# Altium PCB Power_Box_V0.PcbDoc (part 1 of 4)
Units mm, origin at the board's own origin, x right, y up, seen from the top; angles counter-clockwise.
Board outline 145 x 110 mm, 2 copper layers (Top Layer, Bottom Layer); 400 components, 300 nets, 1205 pads, 270 vias.
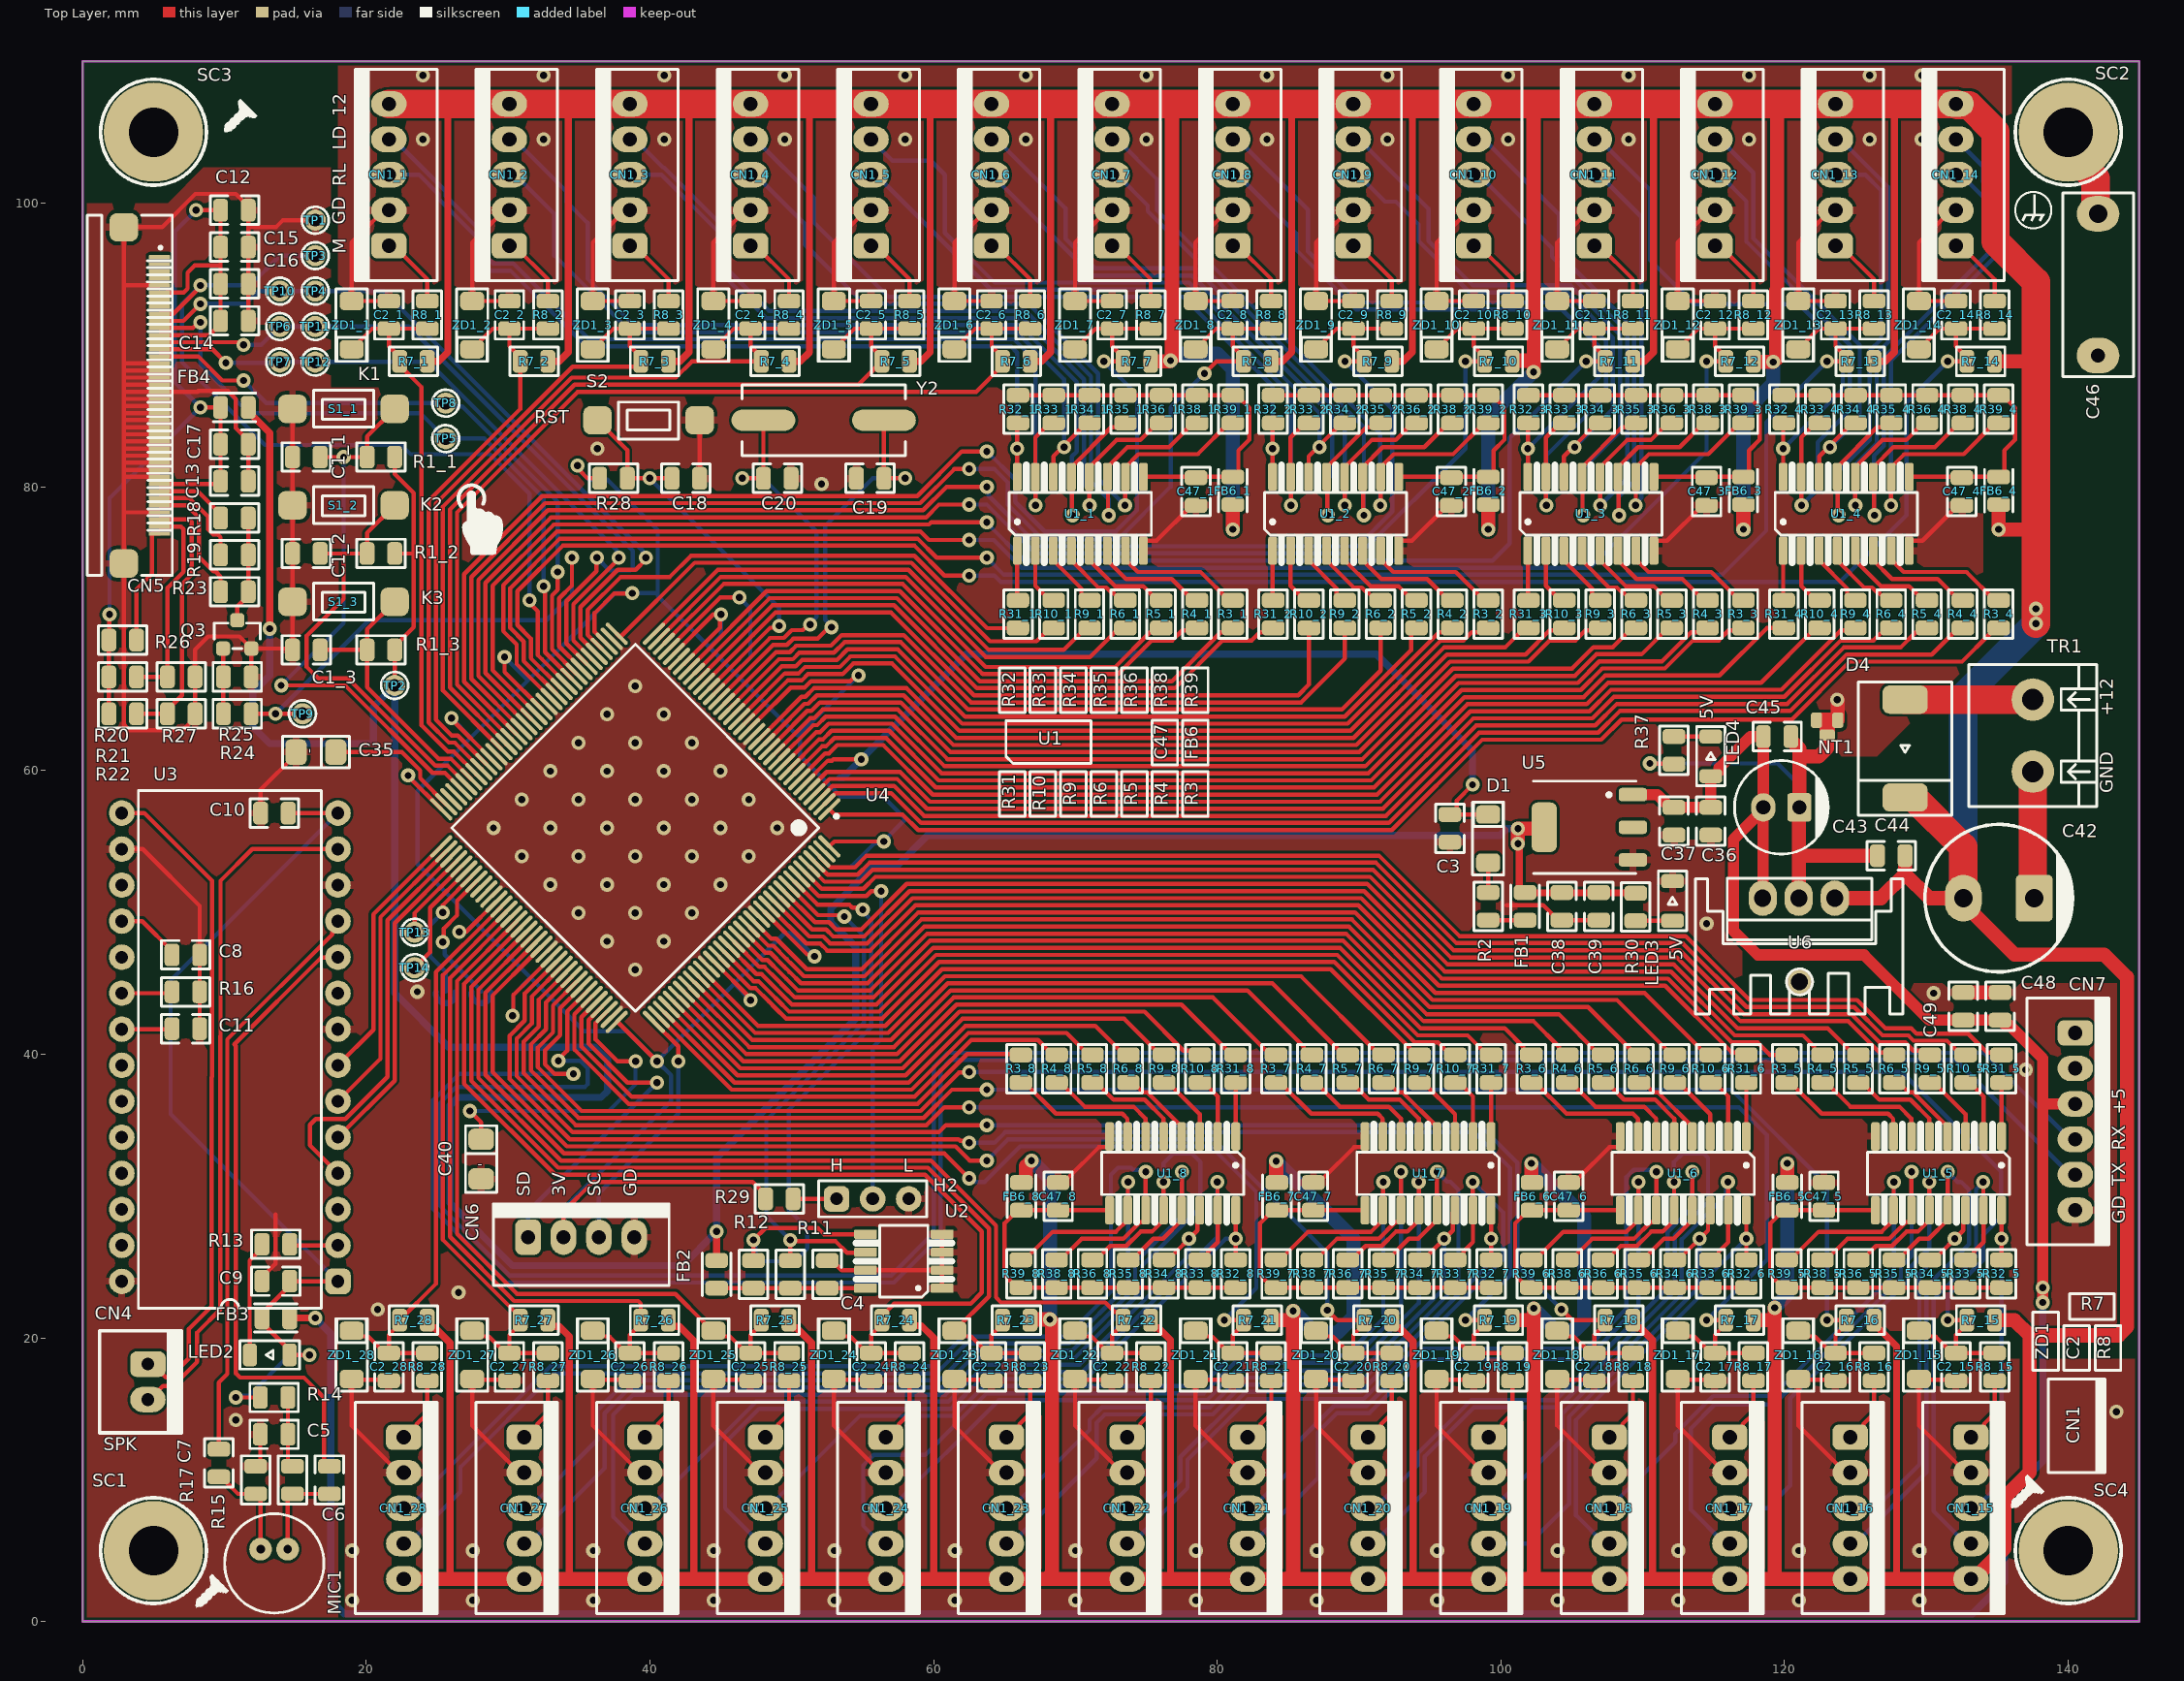
[diagram p0: Top Layer view]
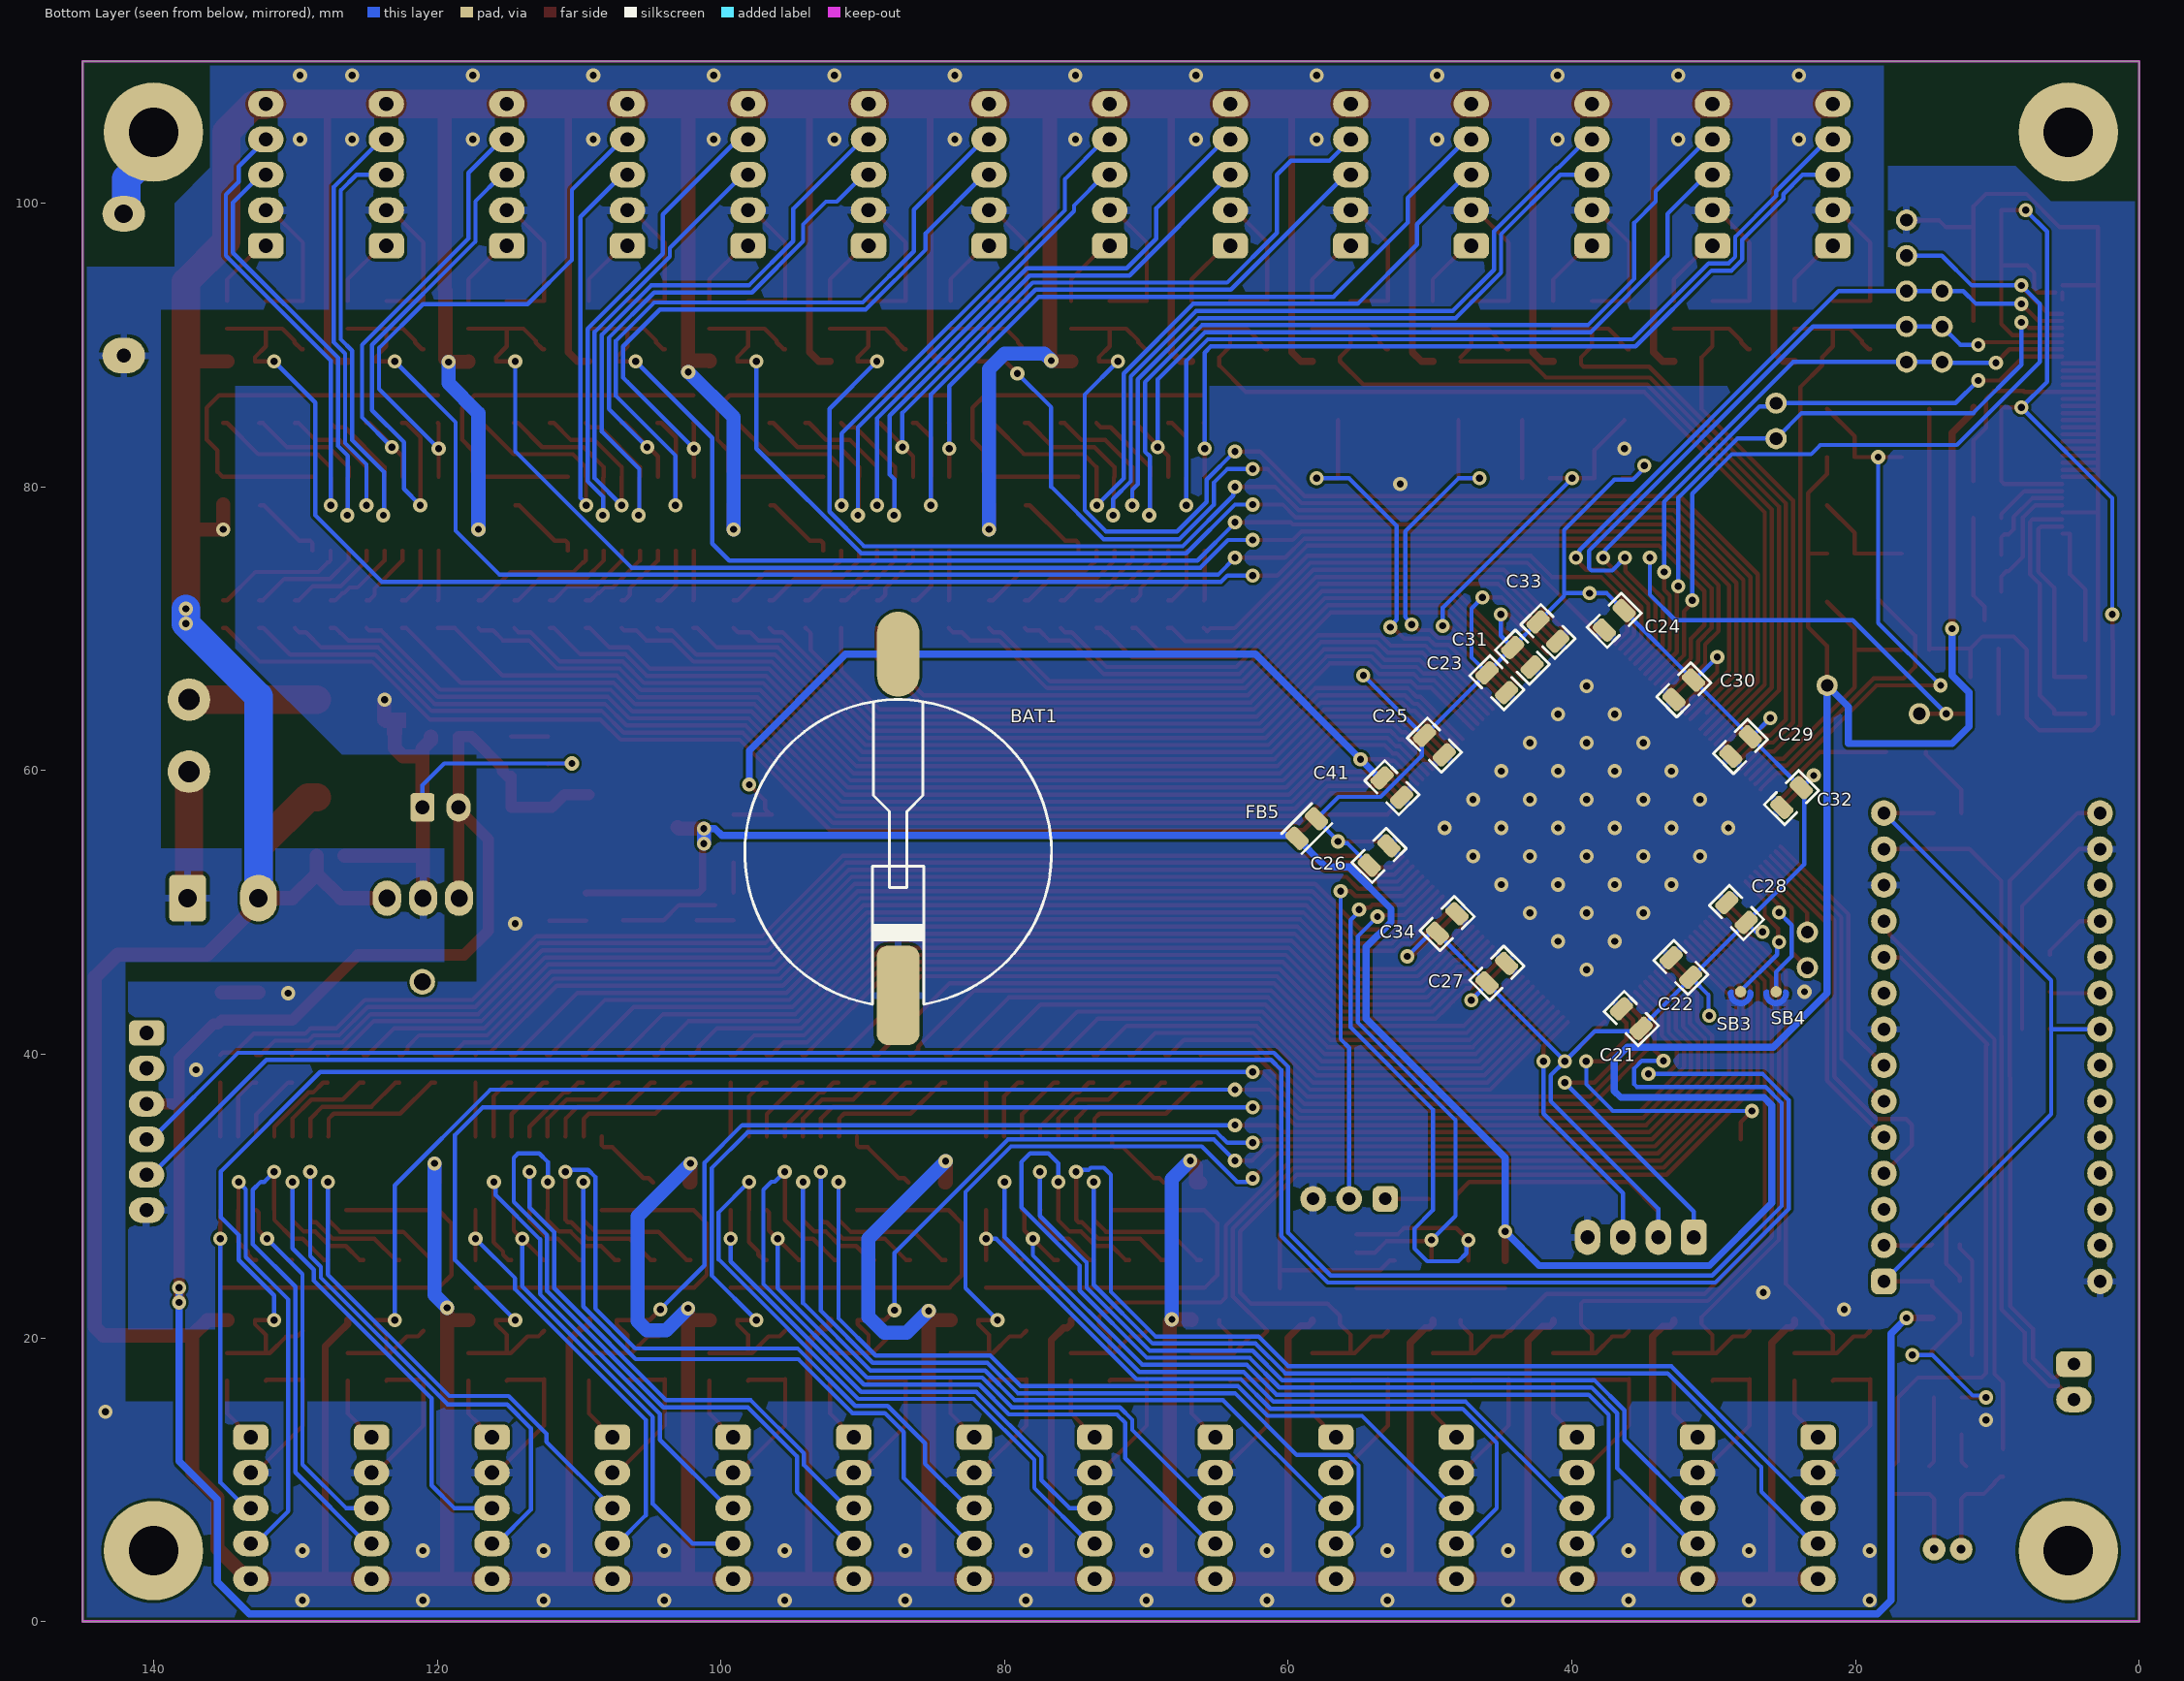
[diagram p1: Bottom Layer view, seen from below]
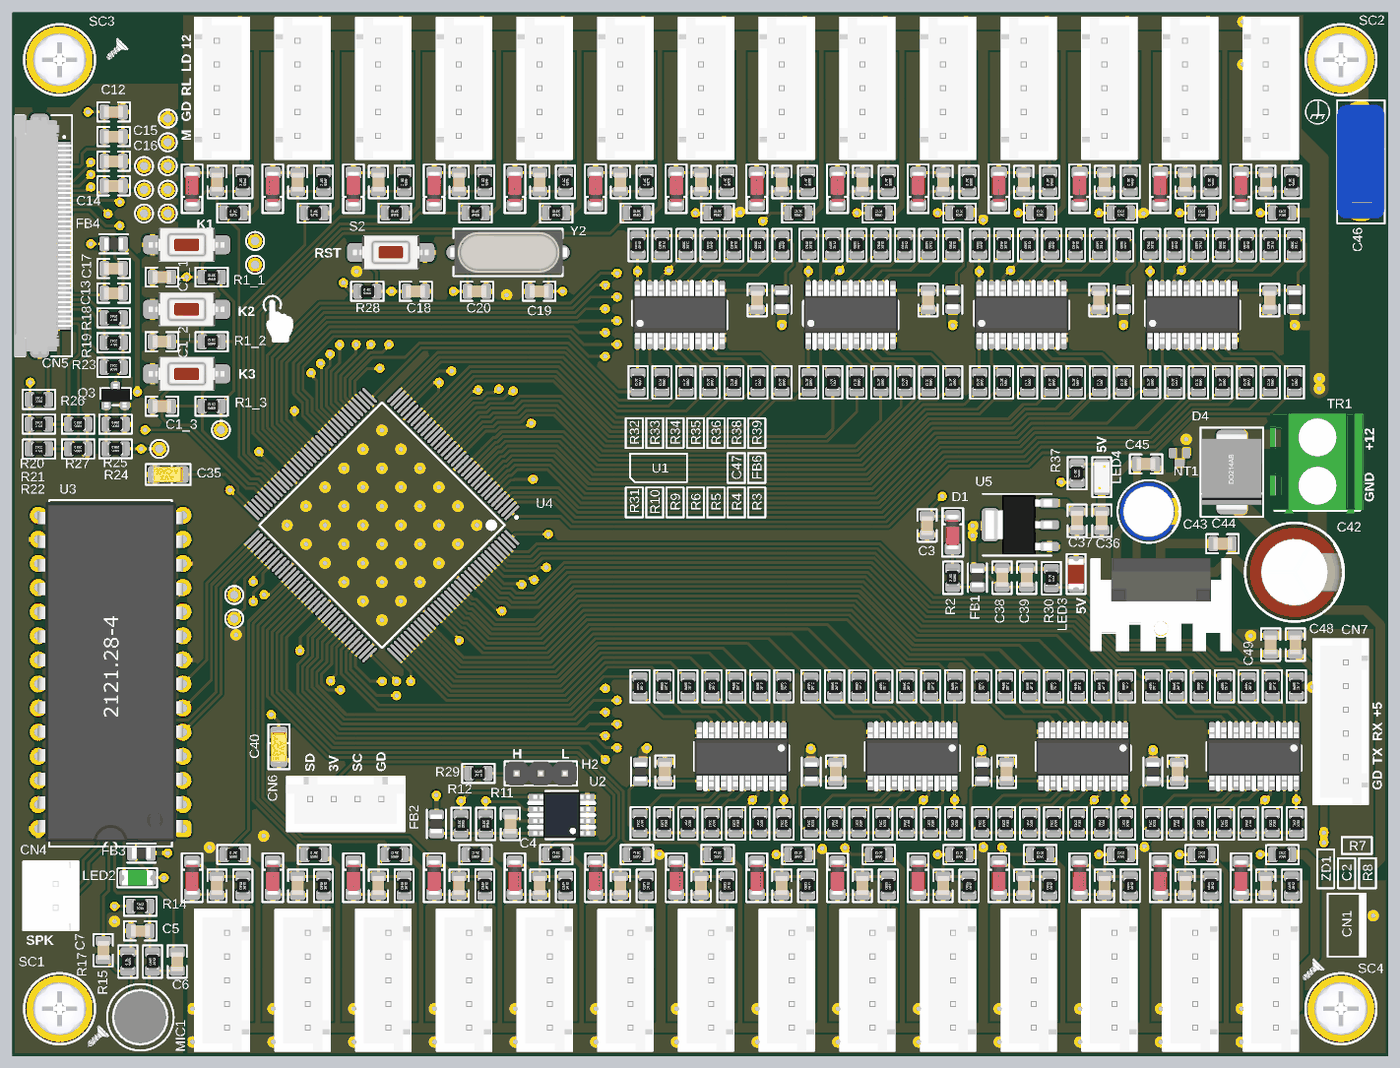
[diagram p5: 3D render of the assembled board from above, using the file's embedded part models]
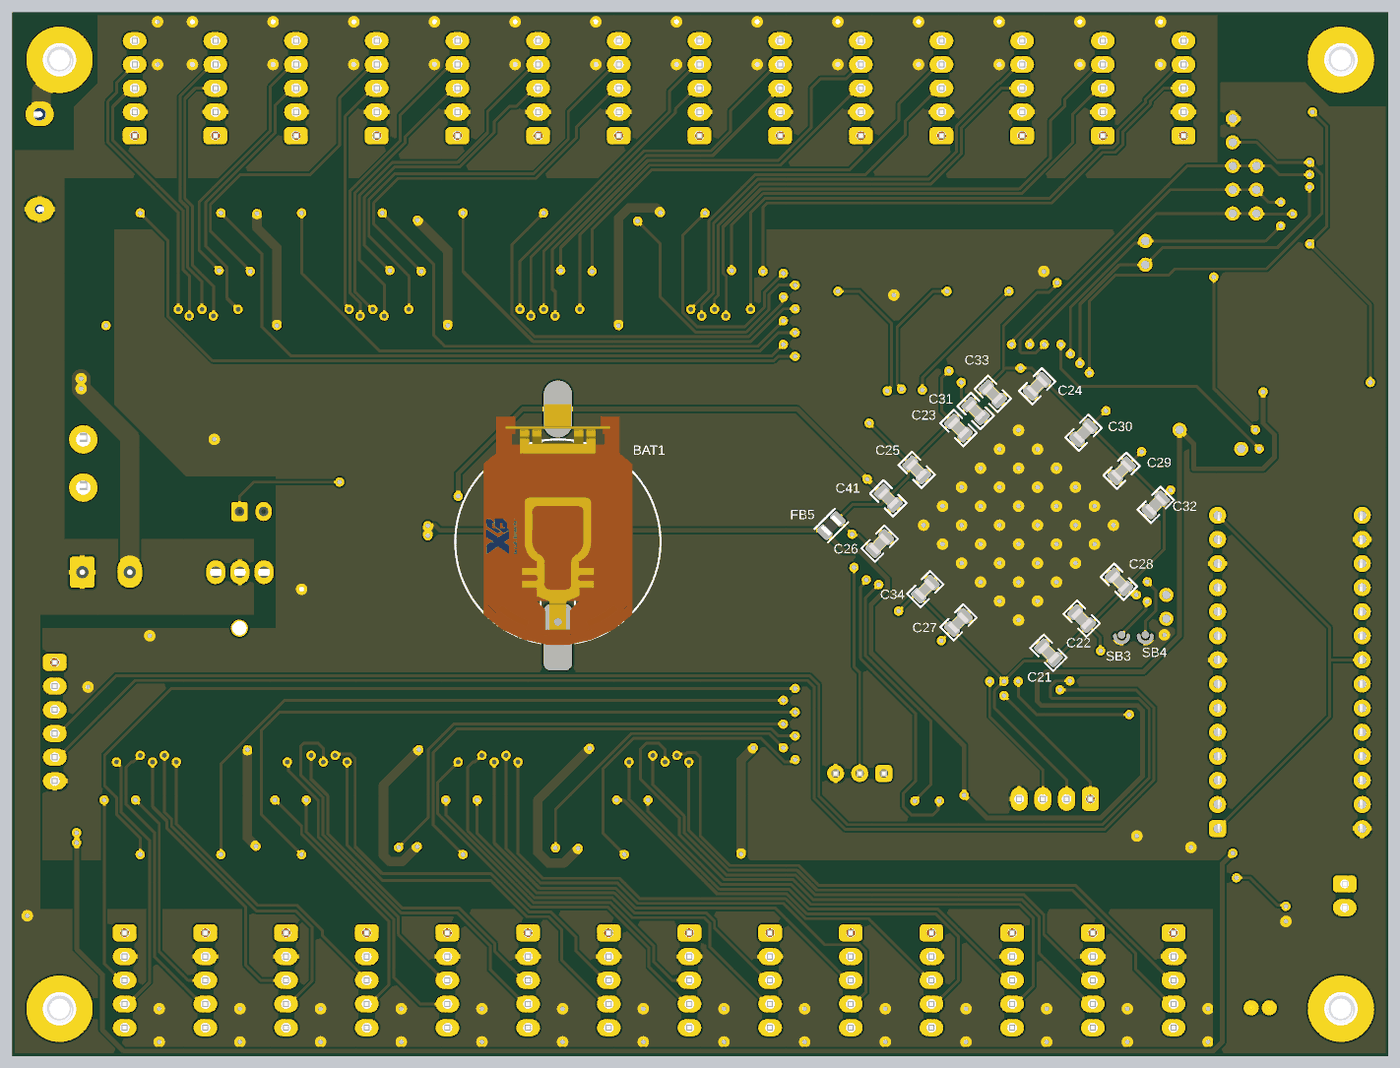
[diagram p6: 3D render of the assembled board from below, using the file's embedded part models]

## Layer stack, top to bottom
Top Solder: solder mask 0.0102, Solder Resist, Dk 3.5
Top Layer: signal copper 0.0356
Dielectric 1: dielectric 0.32, FR-4, Dk 4.8
Bottom Layer: signal copper 0.0356
Bottom Solder: solder mask 0.0102, Solder Resist, Dk 3.5

## Board outline
0,0 0,110 145,110 145,0

## Design rules (kind name [scope] priority, off if disabled: settings)
Clearance [All] p1: gap=0.2 ignorepadtopadclearanceinfootprint=TRUE
ComponentClearance ComponentClearance_U3 [InComponent('U3') vs (HasFootprint('FB-0805') OR HasFootprint('R-0805') OR HasFootprint('C-0805'))] p1: gap=0.3 collisioncheckmode=3 verticalgap=0 showdistances=FALSE
ComponentClearance [All] p2: gap=0.3 collisioncheckmode=3 verticalgap=0.254 showdistances=FALSE checkcomponentboundary=TRUE
DiffPairsRouting [All] p1: maxlimit=0.3 minlimit=0.2 mostfreqgap=0.3 toplayer_minwidth=0.3 toplayer_maxwidth=0.5 toplayer_prefwidth=0.3 bottomlayer_minwidth=0.3 bottomlayer_maxwidth=0.5 bottomlayer_prefwidth=0.3 maxuncoupledlength=12.7
Height [All] p1: minheight=0 maxheight=50.4 prefheight=12.7
HoleSize [All] p1: absolutevalues=TRUE maxlimit=25.4 minlimit=0.5 maxpercent=80.000 minpercent=20.000
PolygonConnect [All] p1: thpad.connectstyle=Relief thpad.reliefconductorwidth=0.5 thpad.reliefentries=4 thpad.polygonreliefangle="90 Angle" thpad.airgapwidth=0.254 smdpad.connectstyle=Relief smdpad.reliefconductorwidth=0.5 smdpad.reliefentries=4 smdpad.polygonreliefangle="90 Angle" smdpad.airgapwidth=0.254 via.connectstyle=Direct via.reliefconductorwidth=0.5 via.reliefentries=4 via.polygonreliefangle="90 Angle" via.airgapwidth=0.254
RoomDefinition CHANNELT [InComponentClass('CHANNELT')] p1: confinementstyle=ConfineIn formatcopy=FALSE lockcomponents=FALSE outline 102.5,22.5 94,22.5 94,0 102.5,0
RoomDefinition CHANNELK [InComponentClass('CHANNELK')] p2: confinementstyle=ConfineIn formatcopy=TRUE lockcomponents=FALSE outline 94,87.5 102.5,87.5 102.5,110 94,110
RoomDefinition CHANNELI [InComponentClass('CHANNELI')] p3: confinementstyle=ConfineIn formatcopy=TRUE lockcomponents=FALSE outline 77,87.5 85.5,87.5 85.5,110 77,110
RoomDefinition CHANNELAC [InComponentClass('CHANNELAC')] p4: confinementstyle=ConfineIn formatcopy=FALSE lockcomponents=FALSE outline 26,22.5 17.5,22.5 17.5,0 26,0
RoomDefinition CHANNELB [InComponentClass('CHANNELB')] p5: confinementstyle=ConfineIn formatcopy=TRUE lockcomponents=FALSE outline 17.5,87.5 26,87.5 26,110 17.5,110
RoomDefinition TFT [InComponentClass('TFT')] p6: confinementstyle=ConfineOut formatcopy=TRUE lockcomponents=FALSE outline 153.943,154.371 308.756,154.371 308.756,235.778 153.943,235.778
RoomDefinition CHANNELE [InComponentClass('CHANNELE')] p7: confinementstyle=ConfineIn formatcopy=TRUE lockcomponents=FALSE outline 43,87.5 51.5,87.5 51.5,110 43,110
RoomDefinition ULN2003_7 [InComponentClass('ULN2003_7')] p8: confinementstyle=ConfineIn formatcopy=TRUE lockcomponents=FALSE outline 100.5,41 82.505,41 82.505,22.5 100.5,22.5
RoomDefinition ULN2003_8 [InComponentClass('ULN2003_8')] p9: confinementstyle=ConfineIn formatcopy=TRUE lockcomponents=FALSE outline 82.5,41 64.505,41 64.505,22.5 82.5,22.5
RoomDefinition ULN2003_4 [InComponentClass('ULN2003_4')] p10: confinementstyle=ConfineIn formatcopy=FALSE lockcomponents=FALSE outline 118.5,69 136.5,69 136.5,87.5 118.5,87.5
RoomDefinition CHANNELO [InComponentClass('CHANNELO')] p11: confinementstyle=ConfineIn formatcopy=FALSE lockcomponents=FALSE outline 128,87.5 136.5,87.5 136.5,110 128,110
RoomDefinition CHANNELS [InComponentClass('CHANNELS')] p12: confinementstyle=ConfineIn formatcopy=FALSE lockcomponents=FALSE outline 111,22.5 102.5,22.5 102.5,0 111,0
RoomDefinition CHANNELU [InComponentClass('CHANNELU')] p13: confinementstyle=ConfineIn formatcopy=FALSE lockcomponents=FALSE outline 94,22.5 85.5,22.5 85.5,0 94,0
RoomDefinition CHANNELV [InComponentClass('CHANNELV')] p14: confinementstyle=ConfineIn formatcopy=FALSE lockcomponents=FALSE outline 85.5,22.5 77,22.5 77,0 85.5,0
RoomDefinition CHANNELP [InComponentClass('CHANNELP')] p15: confinementstyle=ConfineIn formatcopy=FALSE lockcomponents=FALSE outline 136.5,22.5 128,22.5 128,0 136.5,0
RoomDefinition CHANNELD [InComponentClass('CHANNELD')] p16: confinementstyle=ConfineIn formatcopy=TRUE lockcomponents=FALSE outline 34.5,87.5 43,87.5 43,110 34.5,110
RoomDefinition ULN2003_1 [InComponentClass('ULN2003_1')] p17: confinementstyle=ConfineIn formatcopy=FALSE lockcomponents=FALSE outline 64.5,69 82.5,69 82.5,87.5 64.5,87.5
RoomDefinition ULN2003_2 [InComponentClass('ULN2003_2')] p18: confinementstyle=ConfineIn formatcopy=FALSE lockcomponents=FALSE outline 82.5,69 100.5,69 100.5,87.5 82.5,87.5
RoomDefinition CHANNELN [InComponentClass('CHANNELN')] p19: confinementstyle=ConfineIn formatcopy=TRUE lockcomponents=FALSE outline 119.5,87.5 128,87.5 128,110 119.5,110
RoomDefinition CHANNELAB [InComponentClass('CHANNELAB')] p20: confinementstyle=ConfineIn formatcopy=FALSE lockcomponents=FALSE outline 34.5,22.5 26,22.5 26,0 34.5,0
RoomDefinition CHANNELAA [InComponentClass('CHANNELAA')] p21: confinementstyle=ConfineIn formatcopy=FALSE lockcomponents=FALSE outline 43,22.5 34.5,22.5 34.5,0 43,0
RoomDefinition CHANNELZ [InComponentClass('CHANNELZ')] p22: confinementstyle=ConfineIn formatcopy=FALSE lockcomponents=FALSE outline 51.5,22.5 43,22.5 43,0 51.5,0
RoomDefinition CHANNELY [InComponentClass('CHANNELY')] p23: confinementstyle=ConfineIn formatcopy=FALSE lockcomponents=FALSE outline 60,22.5 51.5,22.5 51.5,0 60,0
RoomDefinition CHANNELX [InComponentClass('CHANNELX')] p24: confinementstyle=ConfineIn formatcopy=FALSE lockcomponents=FALSE outline 68.5,22.5 60,22.5 60,0 68.5,0
RoomDefinition CHANNELW [InComponentClass('CHANNELW')] p25: confinementstyle=ConfineIn formatcopy=FALSE lockcomponents=FALSE outline 77,22.5 68.5,22.5 68.5,0 77,0
RoomDefinition CHANNELH [InComponentClass('CHANNELH')] p26: confinementstyle=ConfineIn formatcopy=TRUE lockcomponents=FALSE outline 68.5,87.5 77,87.5 77,110 68.5,110
RoomDefinition ULN2003_6 [InComponentClass('ULN2003_6')] p27: confinementstyle=ConfineIn formatcopy=TRUE lockcomponents=FALSE outline 118.5,41 100.505,41 100.505,22.5 118.5,22.5
RoomDefinition ULN2003_5 [InComponentClass('ULN2003_5')] p28: confinementstyle=ConfineIn formatcopy=FALSE lockcomponents=FALSE outline 136.495,41 118.5,41 118.5,22.5 136.495,22.5
RoomDefinition ULN2003_3 [InComponentClass('ULN2003_3')] p29: confinementstyle=ConfineIn formatcopy=FALSE lockcomponents=FALSE outline 100.5,69 118.5,69 118.5,87.5 100.5,87.5
RoomDefinition STM_AUX [InComponentClass('STM_AUX')] p30: confinementstyle=ConfineOut formatcopy=TRUE lockcomponents=FALSE outline 153.943,120.081 368.573,120.081 368.573,153.101 153.943,153.101
RoomDefinition Power [InComponentClass('Power')] p31: confinementstyle=ConfineOut formatcopy=TRUE lockcomponents=FALSE outline 153.943,105.73 236.747,105.73 236.747,118.811 153.943,118.811
RoomDefinition MCU [InComponentClass('MCU')] p32: confinementstyle=ConfineOut formatcopy=TRUE lockcomponents=FALSE outline 194.362,74.711 219,74.711 219,101 194.362,101
RoomDefinition KEYD [InComponentClass('KEYD')] p33: confinementstyle=ConfineOut formatcopy=TRUE lockcomponents=FALSE outline 126.436,154.1 143.2,154.1 143.2,167.054 126.436,167.054
RoomDefinition KEYC [InComponentClass('KEYC')] p34: confinementstyle=ConfineOut formatcopy=TRUE lockcomponents=FALSE outline 126.143,138.616 142.907,138.616 142.907,151.57 126.143,151.57
RoomDefinition KEYB [InComponentClass('KEYB')] p35: confinementstyle=ConfineOut formatcopy=TRUE lockcomponents=FALSE outline 126.143,124.392 142.907,124.392 142.907,137.346 126.143,137.346
RoomDefinition ISD1730 [InComponentClass('ISD1730')] p36: confinementstyle=ConfineOut formatcopy=TRUE lockcomponents=FALSE outline 276.4,6.2 379.397,6.2 379.397,44.935 276.4,44.935
RoomDefinition Interface [InComponentClass('Interface')] p37: confinementstyle=ConfineOut formatcopy=TRUE lockcomponents=FALSE outline 218.7,1.642 268.484,1.642 268.484,21.2 218.7,21.2
RoomDefinition EEPROM [InComponentClass('EEPROM')] p38: confinementstyle=ConfineOut formatcopy=TRUE lockcomponents=FALSE outline 222.808,25.1 247.7,25.1 247.7,34.371 222.808,34.371
RoomDefinition CHANNELR [InComponentClass('CHANNELR')] p39: confinementstyle=ConfineIn formatcopy=FALSE lockcomponents=FALSE outline 119.5,22.5 111,22.5 111,0 119.5,0
RoomDefinition CHANNELQ [InComponentClass('CHANNELQ')] p40: confinementstyle=ConfineIn formatcopy=FALSE lockcomponents=FALSE outline 128,22.5 119.5,22.5 119.5,0 128,0
RoomDefinition CHANNELM [InComponentClass('CHANNELM')] p41: confinementstyle=ConfineIn formatcopy=TRUE lockcomponents=FALSE outline 111,87.5 119.5,87.5 119.5,110 111,110
RoomDefinition CHANNELL [InComponentClass('CHANNELL')] p42: confinementstyle=ConfineIn formatcopy=TRUE lockcomponents=FALSE outline 102.5,87.5 111,87.5 111,110 102.5,110
RoomDefinition CHANNELJ [InComponentClass('CHANNELJ')] p43: confinementstyle=ConfineIn formatcopy=TRUE lockcomponents=FALSE outline 85.5,87.5 94,87.5 94,110 85.5,110
RoomDefinition CHANNELG [InComponentClass('CHANNELG')] p44: confinementstyle=ConfineIn formatcopy=TRUE lockcomponents=FALSE outline 60,87.5 68.5,87.5 68.5,110 60,110
RoomDefinition CHANNELF [InComponentClass('CHANNELF')] p45: confinementstyle=ConfineIn formatcopy=TRUE lockcomponents=FALSE outline 51.5,87.5 60,87.5 60,110 51.5,110
RoomDefinition CHANNELC [InComponentClass('CHANNELC')] p46: confinementstyle=ConfineIn formatcopy=TRUE lockcomponents=FALSE outline 26,87.5 34.5,87.5 34.5,110 26,110
RoutingVias [All] p1: holewidth=0.711 width=1.27 viastyle="Through Hole" minholewidth=0.5 minwidth=1 maxholewidth=0.711 maxwidth=1.27
SolderMaskExpansion [All] p1: expansion=0.102 istentingtop=FALSE
Width [All] p1: maxlimit=2 minlimit=0.3 preferedwidth=0.5
26 further rules are at their usual default settings.

## Classes and differential pairs
channel class ULN2003: ULN2003_1 ULN2003_2 ULN2003_3 ULN2003_4 ULN2003_5 ULN2003_6 ULN2003_7 ULN2003_8
channel class "Digital Input": KEYB KEYC KEYD
channel class Channel: CHANNELAA CHANNELAB CHANNELAC CHANNELB CHANNELC CHANNELD CHANNELE CHANNELF CHANNELG CHANNELH CHANNELI CHANNELJ CHANNELK CHANNELL CHANNELM CHANNELN CHANNELO CHANNELP CHANNELQ CHANNELR CHANNELS CHANNELT CHANNELU CHANNELV CHANNELW CHANNELX CHANNELY CHANNELZ
net class STM32: GND_MCU ISD_MISO ISD_MOSI ISD_SCK ISD_SS MCU_BOOT0 MCU_KEY1 MCU_KEY2 MCU_KEY3 MCU_LED1 MCU_LED2 MCU_LED3 MCU_LED4 MCU_LED5 MCU_LED6 MCU_LED7 MCU_LED8 MCU_LED9 MCU_LED10 MCU_LED11 MCU_LED12 MCU_LED13 MCU_LED14 MCU_LED15 MCU_LED16 MCU_LED17 MCU_LED18 MCU_LED19 MCU_LED20 MCU_LED21 MCU_LED22 MCU_LED23 MCU_LED24 MCU_LED25 MCU_LED26 MCU_LED27 MCU_LED28 MCU_MAGNET1 MCU_MAGNET2 MCU_MAGNET3 MCU_MAGNET4 MCU_MAGNET5 MCU_MAGNET6 MCU_MAGNET7 MCU_MAGNET8 MCU_MAGNET9 MCU_MAGNET10 MCU_MAGNET11 MCU_MAGNET12 MCU_MAGNET13 MCU_MAGNET14 MCU_MAGNET15 MCU_MAGNET16 MCU_MAGNET17 MCU_MAGNET18 MCU_MAGNET19 MCU_MAGNET20 MCU_MAGNET21 MCU_MAGNET22 MCU_MAGNET23 MCU_MAGNET24 MCU_MAGNET25 MCU_MAGNET26 MCU_MAGNET27 MCU_MAGNET28 MCU_NRST MCU_OCS_N MCU_OCS_P MCU_RELAY1 MCU_RELAY2 MCU_RELAY3 MCU_RELAY4 MCU_RELAY5 MCU_RELAY6 MCU_RELAY7 MCU_RELAY8 MCU_RELAY9 MCU_RELAY10 MCU_RELAY11 MCU_RELAY12 MCU_RELAY13 MCU_RELAY14 MCU_RELAY15 MCU_RELAY16 MCU_RELAY17 MCU_RELAY18 MCU_RELAY19 MCU_RELAY20 MCU_RELAY21 MCU_RELAY22 MCU_RELAY23 MCU_RELAY24 MCU_RELAY25 MCU_RELAY26 MCU_RELAY27 MCU_RELAY28 MCU_RXD MCU_SCL MCU_SDA MCU_SWCLK MCU_SWDIO MCU_TXD MCU_VBAT NetSB1_2 NetSB2_2 NetSB3_2 NetSB4_2 NetU4_132 NetU4_133 NetU4_134 NetU4_135 NetU4_139 NetU4_140 NetU4_141 NetU4_142 NetU4_143 TFT_BLK TFT_CLK TFT_CS TFT_CS_2 TFT_CS_3 TFT_DC TFT_MISO TFT_MOSI TFT_RES V_CAP_1 V_CAP_2 VCC_MCU
net class RELAY[1..28]: RELAY1 RELAY2 RELAY3 RELAY4 RELAY5 RELAY6 RELAY7 RELAY8 RELAY9 RELAY10 RELAY11 RELAY12 RELAY13 RELAY14 RELAY15 RELAY16 RELAY17 RELAY18 RELAY19 RELAY20 RELAY21 RELAY22 RELAY23 RELAY24 RELAY25 RELAY26 RELAY27 RELAY28
net class MCU_RELAY[1..28]: MCU_RELAY1 MCU_RELAY2 MCU_RELAY3 MCU_RELAY4 MCU_RELAY5 MCU_RELAY6 MCU_RELAY7 MCU_RELAY8 MCU_RELAY9 MCU_RELAY10 MCU_RELAY11 MCU_RELAY12 MCU_RELAY13 MCU_RELAY14 MCU_RELAY15 MCU_RELAY16 MCU_RELAY17 MCU_RELAY18 MCU_RELAY19 MCU_RELAY20 MCU_RELAY21 MCU_RELAY22 MCU_RELAY23 MCU_RELAY24 MCU_RELAY25 MCU_RELAY26 MCU_RELAY27 MCU_RELAY28
net class MCU_MAGNET[1..28]: MCU_MAGNET1 MCU_MAGNET2 MCU_MAGNET3 MCU_MAGNET4 MCU_MAGNET5 MCU_MAGNET6 MCU_MAGNET7 MCU_MAGNET8 MCU_MAGNET9 MCU_MAGNET10 MCU_MAGNET11 MCU_MAGNET12 MCU_MAGNET13 MCU_MAGNET14 MCU_MAGNET15 MCU_MAGNET16 MCU_MAGNET17 MCU_MAGNET18 MCU_MAGNET19 MCU_MAGNET20 MCU_MAGNET21 MCU_MAGNET22 MCU_MAGNET23 MCU_MAGNET24 MCU_MAGNET25 MCU_MAGNET26 MCU_MAGNET27 MCU_MAGNET28
net class MCU_LED[1..28]: MCU_LED1 MCU_LED2 MCU_LED3 MCU_LED4 MCU_LED5 MCU_LED6 MCU_LED7 MCU_LED8 MCU_LED9 MCU_LED10 MCU_LED11 MCU_LED12 MCU_LED13 MCU_LED14 MCU_LED15 MCU_LED16 MCU_LED17 MCU_LED18 MCU_LED19 MCU_LED20 MCU_LED21 MCU_LED22 MCU_LED23 MCU_LED24 MCU_LED25 MCU_LED26 MCU_LED27 MCU_LED28
net class MCU_KEY[1..3]: MCU_KEY1 MCU_KEY2 MCU_KEY3
net class LED[1..28]: LED1 LED2 LED3 LED4 LED5 LED6 LED7 LED8 LED9 LED10 LED11 LED12 LED13 LED14 LED15 LED16 LED17 LED18 LED19 LED20 LED21 LED22 LED23 LED24 LED25 LED26 LED27 LED28
net class ISD: +5 GND_MCU ISD_LED ISD_MIC_N ISD_MIC_P ISD_MISO ISD_MOSI ISD_SCK ISD_SS NetC5_1 NetC6_1 NetC7_1 NetC8_1 NetLED2_2 NetR16_2 NetU3_3 NetU3_9 NetU3_17 NetU3_19 NetU3_22 NetU3_23 NetU3_24 NetU3_25 NetU3_26 NetU3_27 SPK_N SPK_P VCC_ISD
net class FPC: GND_MCU NetCN5_1 NetCN5_2 NetCN5_3 NetCN5_4 NetCN5_8 TFT_CLK TFT_CS TFT_DC TFT_IM0 TFT_IM1 TFT_IM2 TFT_LED_K1 TFT_LED_K2 TFT_LED_K3 TFT_MISO TFT_MOSI TFT_RES VCC_TFT
component class ULN2003_3: C47_3 FB6_3 R3_3 R4_3 R5_3 R6_3 R9_3 R10_3 R31_3 R32_3 R33_3 R34_3 R35_3 R36_3 R38_3 R39_3 U1_3
component class ULN2003_8: C47_8 FB6_8 R3_8 R4_8 R5_8 R6_8 R9_8 R10_8 R31_8 R32_8 R33_8 R34_8 R35_8 R36_8 R38_8 R39_8 U1_8
component class ULN2003_7: C47_7 FB6_7 R3_7 R4_7 R5_7 R6_7 R9_7 R10_7 R31_7 R32_7 R33_7 R34_7 R35_7 R36_7 R38_7 R39_7 U1_7
component class ULN2003_6: C47_6 FB6_6 R3_6 R4_6 R5_6 R6_6 R9_6 R10_6 R31_6 R32_6 R33_6 R34_6 R35_6 R36_6 R38_6 R39_6 U1_6
component class ULN2003_5: C47_5 FB6_5 R3_5 R4_5 R5_5 R6_5 R9_5 R10_5 R31_5 R32_5 R33_5 R34_5 R35_5 R36_5 R38_5 R39_5 U1_5
component class ULN2003_4: C47_4 FB6_4 R3_4 R4_4 R5_4 R6_4 R9_4 R10_4 R31_4 R32_4 R33_4 R34_4 R35_4 R36_4 R38_4 R39_4 U1_4
component class ULN2003_2: C47_2 FB6_2 R3_2 R4_2 R5_2 R6_2 R9_2 R10_2 R31_2 R32_2 R33_2 R34_2 R35_2 R36_2 R38_2 R39_2 U1_2
component class ULN2003_1: C47_1 FB6_1 R3_1 R4_1 R5_1 R6_1 R9_1 R10_1 R31_1 R32_1 R33_1 R34_1 R35_1 R36_1 R38_1 R39_1 U1_1
component class TFT: C12 C13 C14 C15 C16 C17 CN5 FB4 Q3 R18 R19 R20 R21 R22 R23 R24 R25 R26 R27 TP1 TP2 TP3 TP4 TP5 TP6 TP7 TP8 TP9 TP10 TP11 TP12 TP13 TP14
component class STM_AUX: BAT1 C3 C18 C19 C20 C21 C22 C23 C24 C25 C26 C27 C28 C29 C30 C31 C32 C33 C34 C35 C36 C37 C38 C39 C40 C41 CN6 D1 FB1 FB5 H2 LED3 NT1 R2 R28 R29 R30 S2 U5 Y2
component class Power: C42 C43 C44 C45 D4 LED4 R37 TR1 U6
component class MCU: SB3 SB4 U4
component class KEYD: C1_3 R1_3 S1_3
component class KEYC: C1_2 R1_2 S1_2
component class KEYB: C1_1 R1_1 S1_1
component class ISD1730: C5 C6 C7 C8 C9 C10 C11 CN4 FB3 LED2 MIC1 R13 R14 R15 R16 R17 U3
component class Interface: C46 C48 C49 CN7 SC1 SC2 SC3 SC4
component class EEPROM: C4 FB2 R11 R12 U2
component class CHANNELZ: C2_25 CN1_25 R7_25 R8_25 ZD1_25
component class CHANNELY: C2_24 CN1_24 R7_24 R8_24 ZD1_24
component class CHANNELX: C2_23 CN1_23 R7_23 R8_23 ZD1_23
component class CHANNELW: C2_22 CN1_22 R7_22 R8_22 ZD1_22
component class CHANNELV: C2_21 CN1_21 R7_21 R8_21 ZD1_21
component class CHANNELU: C2_20 CN1_20 R7_20 R8_20 ZD1_20
component class CHANNELT: C2_19 CN1_19 R7_19 R8_19 ZD1_19
component class CHANNELS: C2_18 CN1_18 R7_18 R8_18 ZD1_18
component class CHANNELR: C2_17 CN1_17 R7_17 R8_17 ZD1_17
component class CHANNELQ: C2_16 CN1_16 R7_16 R8_16 ZD1_16
component class CHANNELP: C2_15 CN1_15 R7_15 R8_15 ZD1_15
component class CHANNELO: C2_14 CN1_14 R7_14 R8_14 ZD1_14
component class CHANNELN: C2_13 CN1_13 R7_13 R8_13 ZD1_13
component class CHANNELM: C2_12 CN1_12 R7_12 R8_12 ZD1_12
component class CHANNELL: C2_11 CN1_11 R7_11 R8_11 ZD1_11
component class CHANNELK: C2_10 CN1_10 R7_10 R8_10 ZD1_10
component class CHANNELJ: C2_9 CN1_9 R7_9 R8_9 ZD1_9
component class CHANNELI: C2_8 CN1_8 R7_8 R8_8 ZD1_8
component class CHANNELH: C2_7 CN1_7 R7_7 R8_7 ZD1_7
component class CHANNELG: C2_6 CN1_6 R7_6 R8_6 ZD1_6
component class CHANNELF: C2_5 CN1_5 R7_5 R8_5 ZD1_5
component class CHANNELE: C2_4 CN1_4 R7_4 R8_4 ZD1_4
component class CHANNELD: C2_3 CN1_3 R7_3 R8_3 ZD1_3
component class CHANNELC: C2_2 CN1_2 R7_2 R8_2 ZD1_2
component class CHANNELB: C2_1 CN1_1 R7_1 R8_1 ZD1_1
component class CHANNELAC: C2_28 CN1_28 R7_28 R8_28 ZD1_28
component class CHANNELAB: C2_27 CN1_27 R7_27 R8_27 ZD1_27
component class CHANNELAA: C2_26 CN1_26 R7_26 R8_26 ZD1_26
differential pair SPK: +SPK_P -SPK_N
differential pair MCU_OCS: +MCU_OCS_P -MCU_OCS_N
differential pair ISD_MIC: +ISD_MIC_P -ISD_MIC_N

## Components (designator, comment, footprint, x,y, rotation, side; value= is the part's Value field where it differs from the comment)
BAT1 "Bat Holder 2016-SMD" BAT-HOLDER-SMD-3V 87.5,56.175 r180 bottom
C1_1 "CAP Cer 100nF-50V-X7R-SMD" C-0805 15.775,82.1 r180 top value=100nF (schematic designator C1)
C1_2 "CAP Cer 100nF-50V-X7R-SMD" C-0805 15.775,75.3 r180 top value=100nF (schematic designator C1)
C1_3 "CAP Cer 100nF-50V-X7R-SMD" C-0805 15.775,68.5 r180 top value=100nF (schematic designator C1)
C2_1 "CAP Cer 100nF-50V-X7R-SMD" C-0805 21.591,92.125 r90 top value=100nF (schematic designator C2)
C2_2 "CAP Cer 100nF-50V-X7R-SMD" C-0805 30.091,92.125 r90 top value=100nF (schematic designator C2)
C2_3 "CAP Cer 100nF-50V-X7R-SMD" C-0805 38.591,92.125 r90 top value=100nF (schematic designator C2)
C2_4 "CAP Cer 100nF-50V-X7R-SMD" C-0805 47.091,92.125 r90 top value=100nF (schematic designator C2)
C2_5 "CAP Cer 100nF-50V-X7R-SMD" C-0805 55.591,92.125 r90 top value=100nF (schematic designator C2)
C2_6 "CAP Cer 100nF-50V-X7R-SMD" C-0805 64.091,92.125 r90 top value=100nF (schematic designator C2)
C2_7 "CAP Cer 100nF-50V-X7R-SMD" C-0805 72.591,92.125 r90 top value=100nF (schematic designator C2)
C2_8 "CAP Cer 100nF-50V-X7R-SMD" C-0805 81.091,92.125 r90 top value=100nF (schematic designator C2)
C2_9 "CAP Cer 100nF-50V-X7R-SMD" C-0805 89.591,92.125 r90 top value=100nF (schematic designator C2)
C2_10 "CAP Cer 100nF-50V-X7R-SMD" C-0805 98.091,92.125 r90 top value=100nF (schematic designator C2)
C2_11 "CAP Cer 100nF-50V-X7R-SMD" C-0805 106.591,92.125 r90 top value=100nF (schematic designator C2)
C2_12 "CAP Cer 100nF-50V-X7R-SMD" C-0805 115.091,92.125 r90 top value=100nF (schematic designator C2)
C2_13 "CAP Cer 100nF-50V-X7R-SMD" C-0805 123.591,92.125 r90 top value=100nF (schematic designator C2)
C2_14 "CAP Cer 100nF-50V-X7R-SMD" C-0805 132.091,92.125 r90 top value=100nF (schematic designator C2)
C2_15 "CAP Cer 100nF-50V-X7R-SMD" C-0805 132.088,17.956 r270 top value=100nF (schematic designator C2)
C2_16 "CAP Cer 100nF-50V-X7R-SMD" C-0805 123.588,17.956 r270 top value=100nF (schematic designator C2)
C2_17 "CAP Cer 100nF-50V-X7R-SMD" C-0805 115.088,17.956 r270 top value=100nF (schematic designator C2)
C2_18 "CAP Cer 100nF-50V-X7R-SMD" C-0805 106.588,17.956 r270 top value=100nF (schematic designator C2)
C2_19 "CAP Cer 100nF-50V-X7R-SMD" C-0805 98.088,17.956 r270 top value=100nF (schematic designator C2)
C2_20 "CAP Cer 100nF-50V-X7R-SMD" C-0805 89.588,17.956 r270 top value=100nF (schematic designator C2)
C2_21 "CAP Cer 100nF-50V-X7R-SMD" C-0805 81.088,17.956 r270 top value=100nF (schematic designator C2)
C2_22 "CAP Cer 100nF-50V-X7R-SMD" C-0805 72.588,17.956 r270 top value=100nF (schematic designator C2)
C2_23 "CAP Cer 100nF-50V-X7R-SMD" C-0805 64.088,17.956 r270 top value=100nF (schematic designator C2)
C2_24 "CAP Cer 100nF-50V-X7R-SMD" C-0805 55.588,17.956 r270 top value=100nF (schematic designator C2)
C2_25 "CAP Cer 100nF-50V-X7R-SMD" C-0805 47.088,17.956 r270 top value=100nF (schematic designator C2)
C2_26 "CAP Cer 100nF-50V-X7R-SMD" C-0805 38.588,17.956 r270 top value=100nF (schematic designator C2)
C2_27 "CAP Cer 100nF-50V-X7R-SMD" C-0805 30.088,17.956 r270 top value=100nF (schematic designator C2)
C2_28 "CAP Cer 100nF-50V-X7R-SMD" C-0805 21.588,17.956 r270 top value=100nF (schematic designator C2)
C3 "CAP Cer 10uF-50V-X7R-SMD" C-0805 96.4,55.925 r90 top value=10uF
C4 "CAP Cer 100nF-50V-X7R-SMD" C-0805 52.5,24.475 r90 top value=100nF
C5 "CAP Cer 4.7uF-50V-X7R-SMD" C-0805 13.5,13.2 r180 top value=4.7uF
C6 "CAP Cer 100nF-50V-X7R-SMD" C-0805 17.4,9.975 r90 top value=100nF
C7 "CAP Cer 100nF-50V-X7R-SMD" C-0805 9.6,11.175 r90 top value=100nF
C8 "CAP Cer 4.7uF-50V-X7R-SMD" C-0805 7.275,47 r0 top value=4.7uF
C9 "CAP Cer 100nF-50V-X7R-SMD" C-0805 13.625,24 r180 top value=100nF
C10 "CAP Cer 100nF-50V-X7R-SMD" C-0805 13.525,57 r180 top value=100nF
C11 "CAP Cer 100nF-50V-X7R-SMD" C-0805 7.275,41.8 r0 top value=100nF
C12 "CAP Cer 1uF-50V-X7R-SMD" C-0805 10.7,99.5 r0 top value=1uF
C13 "CAP Cer 1uF-50V-X7R-SMD" C-0805 10.7,80.4 r0 top value=1uF
C14 "CAP Cer 1uF-50V-X7R-SMD" C-0805 10.7,91.7 r0 top value=1uF
C15 "CAP Cer 1uF-50V-X7R-SMD" C-0805 10.7,96.9 r0 top value=1uF
C16 "CAP Cer 100nF-50V-X7R-SMD" C-0805 10.7,94.3 r0 top value=100nF
C17 "CAP Cer 100nF-50V-X7R-SMD" C-0805 10.7,83 r0 top value=100nF
C18 "CAP Cer 100nF-50V-X7R-SMD" C-0805 42.525,80.6 r0 top value=100nF
C19 "CAP Cer 18pF-50V-X7R-SMD" C-0805 55.525,80.6 r180 top value=18pF
C20 "CAP Cer 18pF-50V-X7R-SMD" C-0805 48.975,80.6 r0 top value=18pF
C21 "CAP Cer 100nF-50V-X7R-SMD" C-0805 35.811,42.511 r45 bottom value=100nF
C22 "CAP Cer 100nF-50V-X7R-SMD" C-0805 32.311,46.111 r45 bottom value=100nF
C23 "CAP Cer 100nF-50V-X7R-SMD" C-0805 45.289,66.189 r225 bottom value=100nF
C24 "CAP Cer 100nF-50V-X7R-SMD" C-0805 37.011,70.589 r315 bottom value=100nF
C25 "CAP Cer 100nF-50V-X7R-SMD" C-0805 49.689,61.789 r225 bottom value=100nF
C26 "CAP Cer 100nF-50V-X7R-SMD" C-0805 53.589,54.011 r135 bottom value=100nF
C27 "CAP Cer 100nF-50V-X7R-SMD" C-0805 45.289,45.711 r135 bottom value=100nF
C28 "CAP Cer 100nF-50V-X7R-SMD" C-0805 28.389,49.989 r45 bottom value=100nF
C29 "CAP Cer 100nF-50V-X7R-SMD" C-0805 28.111,61.689 r315 bottom value=100nF
C30 "CAP Cer 100nF-50V-X7R-SMD" C-0805 32.111,65.689 r315 bottom value=100nF
C31 "CAP Cer 100nF-50V-X7R-SMD" C-0805 43.489,67.989 r225 bottom value=100nF
C32 "CAP Cer 100nF-50V-X7R-SMD" C-0805 24.511,58.089 r315 bottom value=100nF
C33 "CAP Cer 100nF-50V-X7R-SMD" C-0805 41.689,69.789 r225 bottom value=100nF
C34 "CAP Cer 100nF-50V-X7R-SMD" C-0805 48.789,49.211 r135 bottom value=100nF
C35 "" TAN-A 16.445,61.3 r180 top value=2.2uF
C36 "CAP Cer 22uF-50V-X7R-SMD" C-0805 114.8,56.425 r270 top value=22uF
C37 "CAP Cer 100nF-50V-X7R-SMD" C-0805 112.2,56.425 r270 top value=100nF
C38 "CAP Cer 10uF-50V-X7R-SMD" C-0805 104.3,50.425 r270 top value=10uF
C39 "CAP Cer 100nF-50V-X7R-SMD" C-0805 106.9,50.425 r270 top value=100nF
C40 "" TAN-A 28.1,32.6 r270 top value=2.2uF
C41 "CAP Cer 100nF-50V-X7R-SMD" C-0805 52.689,58.789 r45 bottom value=100nF
C42 "CAP Elec 1000uF-25V-10x25-THD" CAP-Elec-10x25-5 135.1,51 r0 top value=1000uF
C43 "CAP Elec 1000uF-10V-10x25-THD" CAP-Elec-6.3x12 119.77,57.4 r0 top value=1000uF
C44 "CAP Cer 100nF-50V-X7R-SMD" C-0805 127.525,54 r180 top value=100nF
C45 "CAP Cer 100nF-50V-X7R-SMD" C-0805 119.475,62.4 r0 top value=100nF
C46 "CAP Cer 10nF-1KV-X7R-THD" CAP-CER-13x5-Ls10 142.1,94.25 r270 top value=10nF
C47_1 "CAP Cer 100nF-50V-X7R-SMD" C-0805 78.502,79.675 r90 top value=100nF (schematic designator C47)
C47_2 "CAP Cer 100nF-50V-X7R-SMD" C-0805 96.502,79.675 r90 top value=100nF (schematic designator C47)
C47_3 "CAP Cer 100nF-50V-X7R-SMD" C-0805 114.502,79.675 r90 top value=100nF (schematic designator C47)
C47_4 "CAP Cer 100nF-50V-X7R-SMD" C-0805 132.502,79.675 r90 top value=100nF (schematic designator C47)
C47_5 "CAP Cer 100nF-50V-X7R-SMD" C-0805 122.77,29.975 r270 top value=100nF (schematic designator C47)
C47_6 "CAP Cer 100nF-50V-X7R-SMD" C-0805 104.775,29.975 r270 top value=100nF (schematic designator C47)
C47_7 "CAP Cer 100nF-50V-X7R-SMD" C-0805 86.775,29.975 r270 top value=100nF (schematic designator C47)
C47_8 "CAP Cer 100nF-50V-X7R-SMD" C-0805 68.775,29.975 r270 top value=100nF (schematic designator C47)
C48 "CAP Cer 100nF-50V-X7R-SMD" C-0805 135.2,43.375 r90 top value=100nF
C49 "CAP Cer 1uF-50V-X7R-SMD" C-0805 132.6,43.375 r90 top value=1uF
CN1_1 "Connector XH/VH/TE-Straight/Right-THD/SMD-?mm" XH-5 21.587,102 r90 top value=XH/VH/TE (schematic designator CN1)
CN1_2 "Connector XH/VH/TE-Straight/Right-THD/SMD-?mm" XH-5 30.087,102 r90 top value=XH/VH/TE (schematic designator CN1)
CN1_3 "Connector XH/VH/TE-Straight/Right-THD/SMD-?mm" XH-5 38.587,102 r90 top value=XH/VH/TE (schematic designator CN1)
CN1_4 "Connector XH/VH/TE-Straight/Right-THD/SMD-?mm" XH-5 47.087,102 r90 top value=XH/VH/TE (schematic designator CN1)
CN1_5 "Connector XH/VH/TE-Straight/Right-THD/SMD-?mm" XH-5 55.587,102 r90 top value=XH/VH/TE (schematic designator CN1)
CN1_6 "Connector XH/VH/TE-Straight/Right-THD/SMD-?mm" XH-5 64.087,102 r90 top value=XH/VH/TE (schematic designator CN1)
CN1_7 "Connector XH/VH/TE-Straight/Right-THD/SMD-?mm" XH-5 72.587,102 r90 top value=XH/VH/TE (schematic designator CN1)
CN1_8 "Connector XH/VH/TE-Straight/Right-THD/SMD-?mm" XH-5 81.087,102 r90 top value=XH/VH/TE (schematic designator CN1)
CN1_9 "Connector XH/VH/TE-Straight/Right-THD/SMD-?mm" XH-5 89.587,102 r90 top value=XH/VH/TE (schematic designator CN1)
CN1_10 "Connector XH/VH/TE-Straight/Right-THD/SMD-?mm" XH-5 98.087,102 r90 top value=XH/VH/TE (schematic designator CN1)
CN1_11 "Connector XH/VH/TE-Straight/Right-THD/SMD-?mm" XH-5 106.587,102 r90 top value=XH/VH/TE (schematic designator CN1)
CN1_12 "Connector XH/VH/TE-Straight/Right-THD/SMD-?mm" XH-5 115.087,102 r90 top value=XH/VH/TE (schematic designator CN1)
CN1_13 "Connector XH/VH/TE-Straight/Right-THD/SMD-?mm" XH-5 123.587,102 r90 top value=XH/VH/TE (schematic designator CN1)
CN1_14 "Connector XH/VH/TE-Straight/Right-THD/SMD-?mm" XH-5 132.087,102 r90 top value=XH/VH/TE (schematic designator CN1)
CN1_15 "Connector XH/VH/TE-Straight/Right-THD/SMD-?mm" XH-5 133.137,8 r270 top value=XH/VH/TE (schematic designator CN1)
CN1_16 "Connector XH/VH/TE-Straight/Right-THD/SMD-?mm" XH-5 124.637,8 r270 top value=XH/VH/TE (schematic designator CN1)
CN1_17 "Connector XH/VH/TE-Straight/Right-THD/SMD-?mm" XH-5 116.137,8 r270 top value=XH/VH/TE (schematic designator CN1)
CN1_18 "Connector XH/VH/TE-Straight/Right-THD/SMD-?mm" XH-5 107.637,8 r270 top value=XH/VH/TE (schematic designator CN1)
CN1_19 "Connector XH/VH/TE-Straight/Right-THD/SMD-?mm" XH-5 99.137,8 r270 top value=XH/VH/TE (schematic designator CN1)
CN1_20 "Connector XH/VH/TE-Straight/Right-THD/SMD-?mm" XH-5 90.637,8 r270 top value=XH/VH/TE (schematic designator CN1)
CN1_21 "Connector XH/VH/TE-Straight/Right-THD/SMD-?mm" XH-5 82.137,8 r270 top value=XH/VH/TE (schematic designator CN1)
CN1_22 "Connector XH/VH/TE-Straight/Right-THD/SMD-?mm" XH-5 73.637,8 r270 top value=XH/VH/TE (schematic designator CN1)
CN1_23 "Connector XH/VH/TE-Straight/Right-THD/SMD-?mm" XH-5 65.137,8 r270 top value=XH/VH/TE (schematic designator CN1)
CN1_24 "Connector XH/VH/TE-Straight/Right-THD/SMD-?mm" XH-5 56.637,8 r270 top value=XH/VH/TE (schematic designator CN1)
CN1_25 "Connector XH/VH/TE-Straight/Right-THD/SMD-?mm" XH-5 48.137,8 r270 top value=XH/VH/TE (schematic designator CN1)
CN1_26 "Connector XH/VH/TE-Straight/Right-THD/SMD-?mm" XH-5 39.637,8 r270 top value=XH/VH/TE (schematic designator CN1)
CN1_27 "Connector XH/VH/TE-Straight/Right-THD/SMD-?mm" XH-5 31.137,8 r270 top value=XH/VH/TE (schematic designator CN1)
CN1_28 "Connector XH/VH/TE-Straight/Right-THD/SMD-?mm" XH-5 22.637,8 r270 top value=XH/VH/TE (schematic designator CN1)
CN4 "XH-2" XH-2 4.6,16.9 r270 top
CN5 "0.5mm-Horizontal" CN-FPC-40-0.5mm-hor 4.157,86.45 r270 top locked
CN6 "Connector XH/VH/TE-Straight/Right-THD/SMD-?mm" XH-4 35.15,27.1 r0 top value=XH/VH/TE
CN7 "Connector XH/VH/TE-Straight/Right-THD/SMD-?mm" XH-6 140.5,35.25 r270 top value=XH/VH/TE
D1 "Diode 1N4148-SMD" SOD80 99.1,55.2 r270 top
D4 "Diode 1N5408-SMD" D-DO214 128.5,61.575 r90 top
FB1 "Ferrite Bead SMD" FB-0805 101.7,50.425 r270 top
FB2 "FERRITE BEAD" FB-0805 44.7,24.475 r90 top
FB3 "FERRITE BEAD" FB-0805 13.625,21.4 r180 top
FB4 "FERRITE BEAD" FB-0805 10.7,85.6 r180 top
FB5 "FERRITE BEAD" FB-0805 58.689,55.911 r135 bottom
FB6_1 "Ferrite Bead SMD" FB-0805 81.1,79.725 r90 top (schematic designator FB6)
FB6_2 "Ferrite Bead SMD" FB-0805 99.1,79.725 r90 top (schematic designator FB6)
FB6_3 "Ferrite Bead SMD" FB-0805 117.1,79.725 r90 top (schematic designator FB6)
FB6_4 "Ferrite Bead SMD" FB-0805 135.1,79.725 r90 top (schematic designator FB6)
FB6_5 "Ferrite Bead SMD" FB-0805 120.195,29.975 r270 top (schematic designator FB6)
FB6_6 "Ferrite Bead SMD" FB-0805 102.2,29.975 r270 top (schematic designator FB6)
FB6_7 "Ferrite Bead SMD" FB-0805 84.2,29.975 r270 top (schematic designator FB6)
FB6_8 "Ferrite Bead SMD" FB-0805 66.2,29.975 r270 top (schematic designator FB6)
H2 "BOOT" H-3pin-M-S 55.7,29.8 r0 top
LED2 "YELLO-0805" LED-1206-G 13.2,18.8 r0 top
LED3 "3V3D" LED-1206-R 112.1,50.8 r270 top
LED4 "LED GREEN-1206-SMD" LED-1206-Y 114.8,61 r270 top
MIC1 "2.2mm" MIC-2.2mm 13.5,5.1 r0 top
NT1 "NET TIE-3" "NET TIE-3" 123,63.025 r180 top net-tie
Q3 "S8050(J3Y)" SOT23-213 10.9,69.6 r0 top
R1_1 "" R-0805 21.025,82.1 r180 top value=10K (schematic designator R1)
R1_2 "" R-0805 21.025,75.3 r180 top value=10K (schematic designator R1)
R1_3 "" R-0805 21.025,68.5 r180 top value=10K (schematic designator R1)
R2 "RES 1K-5%-1/8W-SMD" R-0805 99.098,50.425 r270 top value=1K
R3_1 "RES 1K-5%-1/8W-SMD" R-0805 81.097,71.025 r270 top value=1K (schematic designator R3)
R3_2 "RES 1K-5%-1/8W-SMD" R-0805 99.097,71.025 r270 top value=1K (schematic designator R3)
R3_3 "RES 1K-5%-1/8W-SMD" R-0805 117.097,71.025 r270 top value=1K (schematic designator R3)
R3_4 "RES 1K-5%-1/8W-SMD" R-0805 135.097,71.025 r270 top value=1K (schematic designator R3)
R3_5 "RES 1K-5%-1/8W-SMD" R-0805 120.145,38.975 r90 top value=1K (schematic designator R3)
R3_6 "RES 1K-5%-1/8W-SMD" R-0805 102.15,38.975 r90 top value=1K (schematic designator R3)
R3_7 "RES 1K-5%-1/8W-SMD" R-0805 84.15,38.975 r90 top value=1K (schematic designator R3)
R3_8 "RES 1K-5%-1/8W-SMD" R-0805 66.15,38.975 r90 top value=1K (schematic designator R3)
R4_1 "RES 1K-5%-1/8W-SMD" R-0805 78.571,71.025 r270 top value=1K (schematic designator R4)
R4_2 "RES 1K-5%-1/8W-SMD" R-0805 96.571,71.025 r270 top value=1K (schematic designator R4)
R4_3 "RES 1K-5%-1/8W-SMD" R-0805 114.571,71.025 r270 top value=1K (schematic designator R4)
R4_4 "RES 1K-5%-1/8W-SMD" R-0805 132.571,71.025 r270 top value=1K (schematic designator R4)
R4_5 "RES 1K-5%-1/8W-SMD" R-0805 122.671,38.975 r90 top value=1K (schematic designator R4)
R4_6 "RES 1K-5%-1/8W-SMD" R-0805 104.676,38.975 r90 top value=1K (schematic designator R4)
R4_7 "RES 1K-5%-1/8W-SMD" R-0805 86.676,38.975 r90 top value=1K (schematic designator R4)
R4_8 "RES 1K-5%-1/8W-SMD" R-0805 68.676,38.975 r90 top value=1K (schematic designator R4)
R5_1 "RES 1K-5%-1/8W-SMD" R-0805 76.045,71.025 r270 top value=1K (schematic designator R5)
R5_2 "RES 1K-5%-1/8W-SMD" R-0805 94.045,71.025 r270 top value=1K (schematic designator R5)
R5_3 "RES 1K-5%-1/8W-SMD" R-0805 112.045,71.025 r270 top value=1K (schematic designator R5)
R5_4 "RES 1K-5%-1/8W-SMD" R-0805 130.045,71.025 r270 top value=1K (schematic designator R5)
R5_5 "RES 1K-5%-1/8W-SMD" R-0805 125.197,38.975 r90 top value=1K (schematic designator R5)
R5_6 "RES 1K-5%-1/8W-SMD" R-0805 107.202,38.975 r90 top value=1K (schematic designator R5)
R5_7 "RES 1K-5%-1/8W-SMD" R-0805 89.202,38.975 r90 top value=1K (schematic designator R5)
R5_8 "RES 1K-5%-1/8W-SMD" R-0805 71.202,38.975 r90 top value=1K (schematic designator R5)
R6_1 "RES 1K-5%-1/8W-SMD" R-0805 73.52,71.025 r270 top value=1K (schematic designator R6)
R6_2 "RES 1K-5%-1/8W-SMD" R-0805 91.52,71.025 r270 top value=1K (schematic designator R6)
R6_3 "RES 1K-5%-1/8W-SMD" R-0805 109.52,71.025 r270 top value=1K (schematic designator R6)
R6_4 "RES 1K-5%-1/8W-SMD" R-0805 127.52,71.025 r270 top value=1K (schematic designator R6)
R6_5 "RES 1K-5%-1/8W-SMD" R-0805 127.723,38.975 r90 top value=1K (schematic designator R6)
R6_6 "RES 1K-5%-1/8W-SMD" R-0805 109.727,38.975 r90 top value=1K (schematic designator R6)
R6_7 "RES 1K-5%-1/8W-SMD" R-0805 91.727,38.975 r90 top value=1K (schematic designator R6)
R6_8 "RES 1K-5%-1/8W-SMD" R-0805 73.727,38.975 r90 top value=1K (schematic designator R6)
R7_1 "" R-0805 23.325,88.85 r180 top value=47K (schematic designator R7)
R7_2 "" R-0805 31.825,88.85 r180 top value=47K (schematic designator R7)
R7_3 "" R-0805 40.325,88.85 r180 top value=47K (schematic designator R7)
R7_4 "" R-0805 48.825,88.85 r180 top value=47K (schematic designator R7)
R7_5 "" R-0805 57.325,88.85 r180 top value=47K (schematic designator R7)
R7_6 "" R-0805 65.825,88.85 r180 top value=47K (schematic designator R7)
R7_7 "" R-0805 74.325,88.85 r180 top value=47K (schematic designator R7)
R7_8 "" R-0805 82.825,88.85 r180 top value=47K (schematic designator R7)
R7_9 "" R-0805 91.325,88.85 r180 top value=47K (schematic designator R7)
R7_10 "" R-0805 99.825,88.85 r180 top value=47K (schematic designator R7)
R7_11 "" R-0805 108.325,88.85 r180 top value=47K (schematic designator R7)
R7_12 "" R-0805 116.825,88.85 r180 top value=47K (schematic designator R7)
R7_13 "" R-0805 125.325,88.85 r180 top value=47K (schematic designator R7)
R7_14 "" R-0805 133.825,88.85 r180 top value=47K (schematic designator R7)
R7_15 "" R-0805 133.825,21.25 r180 top value=47K (schematic designator R7)
R7_16 "" R-0805 125.325,21.25 r180 top value=47K (schematic designator R7)
R7_17 "" R-0805 116.825,21.25 r180 top value=47K (schematic designator R7)
R7_18 "" R-0805 108.325,21.25 r180 top value=47K (schematic designator R7)
R7_19 "" R-0805 99.825,21.25 r180 top value=47K (schematic designator R7)
R7_20 "" R-0805 91.325,21.25 r180 top value=47K (schematic designator R7)
R7_21 "" R-0805 82.825,21.25 r180 top value=47K (schematic designator R7)
R7_22 "" R-0805 74.325,21.25 r180 top value=47K (schematic designator R7)
R7_23 "" R-0805 65.825,21.25 r180 top value=47K (schematic designator R7)
R7_24 "" R-0805 57.325,21.25 r180 top value=47K (schematic designator R7)
R7_25 "" R-0805 48.825,21.25 r180 top value=47K (schematic designator R7)
R7_26 "" R-0805 40.325,21.25 r180 top value=47K (schematic designator R7)
R7_27 "" R-0805 31.825,21.25 r180 top value=47K (schematic designator R7)
R7_28 "" R-0805 23.325,21.25 r180 top value=47K (schematic designator R7)
R8_1 "" R-0805 24.305,92.125 r270 top value=470R (schematic designator R8)
R8_2 "" R-0805 32.805,92.125 r270 top value=470R (schematic designator R8)
R8_3 "" R-0805 41.305,92.125 r270 top value=470R (schematic designator R8)
R8_4 "" R-0805 49.805,92.125 r270 top value=470R (schematic designator R8)
R8_5 "" R-0805 58.305,92.125 r270 top value=470R (schematic designator R8)
R8_6 "" R-0805 66.805,92.125 r270 top value=470R (schematic designator R8)
R8_7 "" R-0805 75.305,92.125 r270 top value=470R (schematic designator R8)
R8_8 "" R-0805 83.805,92.125 r270 top value=470R (schematic designator R8)
R8_9 "" R-0805 92.305,92.125 r270 top value=470R (schematic designator R8)
R8_10 "" R-0805 100.805,92.125 r270 top value=470R (schematic designator R8)
R8_11 "" R-0805 109.305,92.125 r270 top value=470R (schematic designator R8)
R8_12 "" R-0805 117.805,92.125 r270 top value=470R (schematic designator R8)
R8_13 "" R-0805 126.305,92.125 r270 top value=470R (schematic designator R8)
R8_14 "" R-0805 134.805,92.125 r270 top value=470R (schematic designator R8)
R8_15 "" R-0805 134.808,17.956 r90 top value=470R (schematic designator R8)
R8_16 "" R-0805 126.308,17.956 r90 top value=470R (schematic designator R8)
R8_17 "" R-0805 117.808,17.956 r90 top value=470R (schematic designator R8)
R8_18 "" R-0805 109.308,17.956 r90 top value=470R (schematic designator R8)
R8_19 "" R-0805 100.808,17.956 r90 top value=470R (schematic designator R8)
R8_20 "" R-0805 92.308,17.956 r90 top value=470R (schematic designator R8)
R8_21 "" R-0805 83.808,17.956 r90 top value=470R (schematic designator R8)
R8_22 "" R-0805 75.308,17.956 r90 top value=470R (schematic designator R8)
R8_23 "" R-0805 66.808,17.956 r90 top value=470R (schematic designator R8)
R8_24 "" R-0805 58.308,17.956 r90 top value=470R (schematic designator R8)
R8_25 "" R-0805 49.808,17.956 r90 top value=470R (schematic designator R8)
R8_26 "" R-0805 41.308,17.956 r90 top value=470R (schematic designator R8)
R8_27 "" R-0805 32.808,17.956 r90 top value=470R (schematic designator R8)
R8_28 "" R-0805 24.308,17.956 r90 top value=470R (schematic designator R8)
R9_1 "RES 1K-5%-1/8W-SMD" R-0805 70.994,71.025 r270 top value=1K (schematic designator R9)
R9_2 "RES 1K-5%-1/8W-SMD" R-0805 88.994,71.025 r270 top value=1K (schematic designator R9)
R9_3 "RES 1K-5%-1/8W-SMD" R-0805 106.994,71.025 r270 top value=1K (schematic designator R9)
R9_4 "RES 1K-5%-1/8W-SMD" R-0805 124.994,71.025 r270 top value=1K (schematic designator R9)
R9_5 "RES 1K-5%-1/8W-SMD" R-0805 130.248,38.975 r90 top value=1K (schematic designator R9)
R9_6 "RES 1K-5%-1/8W-SMD" R-0805 112.253,38.975 r90 top value=1K (schematic designator R9)
R9_7 "RES 1K-5%-1/8W-SMD" R-0805 94.253,38.975 r90 top value=1K (schematic designator R9)
R9_8 "RES 1K-5%-1/8W-SMD" R-0805 76.253,38.975 r90 top value=1K (schematic designator R9)
R10_1 "RES 1K-5%-1/8W-SMD" R-0805 68.468,71.025 r270 top value=1K (schematic designator R10)
R10_2 "RES 1K-5%-1/8W-SMD" R-0805 86.468,71.025 r270 top value=1K (schematic designator R10)
R10_3 "RES 1K-5%-1/8W-SMD" R-0805 104.468,71.025 r270 top value=1K (schematic designator R10)
R10_4 "RES 1K-5%-1/8W-SMD" R-0805 122.468,71.025 r270 top value=1K (schematic designator R10)
R10_5 "RES 1K-5%-1/8W-SMD" R-0805 132.774,38.975 r90 top value=1K (schematic designator R10)
R10_6 "RES 1K-5%-1/8W-SMD" R-0805 114.779,38.975 r90 top value=1K (schematic designator R10)
R10_7 "RES 1K-5%-1/8W-SMD" R-0805 96.779,38.975 r90 top value=1K (schematic designator R10)
R10_8 "RES 1K-5%-1/8W-SMD" R-0805 78.779,38.975 r90 top value=1K (schematic designator R10)
R11 "4.7K-1/8W-5%" R-0805 49.9,24.475 r270 top
R12 "4.7K-1/8W-5%" R-0805 47.3,24.475 r270 top
R13 "1K-1/8W-5%" R-0805 13.625,26.6 r0 top
R14 "4.7K-1/8W-5%" R-0805 13.5,15.8 r180 top
R15 "4.7K-1/8W-5%" R-0805 14.8,9.975 r90 top
R16 "82K-1/8W-5%" R-0805 7.275,44.4 r180 top
R17 "4.7K-1/8W-5%" R-0805 12.2,9.975 r270 top
R18 "10R-1/8W-5%" R-0805 10.7,77.8 r180 top
R19 "10R-1/8W-5%" R-0805 10.7,75.2 r180 top
R20 "4.7K-1/8W-5%" R-0805 2.825,69.2 r180 top
R21 "4.7K-1/8W-5%" R-0805 2.825,66.6 r180 top
R22 "4.7K-1/8W-5%" R-0805 2.825,63.997 r180 top
R23 "10R-1/8W-5%" R-0805 10.7,72.6 r180 top
R24 "1K-1/8W-5%" R-0805 10.9,64 r180 top
R25 "10K-1/8W-5%" R-0805 10.9,66.6 r180 top
R26 "4.7K-1/8W-5%" R-0805 6.95,66.6 r180 top
R27 "4.7K-1/8W-5%" R-0805 6.95,63.997 r180 top
R28 "" R-0805 37.425,80.6 r180 top value=10K
R29 "" R-0805 49.125,29.8 r0 top value=10K
R30 "" R-0805 109.5,50.375 r270 top value=2.2K
R31_1 "RES 1K-5%-1/8W-SMD" R-0805 65.942,71.025 r270 top value=1K (schematic designator R31)
R31_2 "RES 1K-5%-1/8W-SMD" R-0805 83.942,71.025 r270 top value=1K (schematic designator R31)
R31_3 "RES 1K-5%-1/8W-SMD" R-0805 101.942,71.025 r270 top value=1K (schematic designator R31)
R31_4 "RES 1K-5%-1/8W-SMD" R-0805 119.942,71.025 r270 top value=1K (schematic designator R31)
R31_5 "RES 1K-5%-1/8W-SMD" R-0805 135.3,38.975 r90 top value=1K (schematic designator R31)
R31_6 "RES 1K-5%-1/8W-SMD" R-0805 117.305,38.975 r90 top value=1K (schematic designator R31)
R31_7 "RES 1K-5%-1/8W-SMD" R-0805 99.305,38.975 r90 top value=1K (schematic designator R31)
R31_8 "RES 1K-5%-1/8W-SMD" R-0805 81.305,38.975 r90 top value=1K (schematic designator R31)
R32_1 "RES 4.7K-5%-1/8W-SMD" R-0805 65.945,85.475 r90 top value=4.7K (schematic designator R32)
R32_2 "RES 4.7K-5%-1/8W-SMD" R-0805 83.945,85.475 r90 top value=4.7K (schematic designator R32)
R32_3 "RES 4.7K-5%-1/8W-SMD" R-0805 101.945,85.475 r90 top value=4.7K (schematic designator R32)
R32_4 "RES 4.7K-5%-1/8W-SMD" R-0805 119.945,85.475 r90 top value=4.7K (schematic designator R32)
R32_5 "RES 4.7K-5%-1/8W-SMD" R-0805 135.3,24.525 r270 top value=4.7K (schematic designator R32)
R32_6 "RES 4.7K-5%-1/8W-SMD" R-0805 117.305,24.525 r270 top value=4.7K (schematic designator R32)
R32_7 "RES 4.7K-5%-1/8W-SMD" R-0805 99.305,24.525 r270 top value=4.7K (schematic designator R32)
R32_8 "RES 4.7K-5%-1/8W-SMD" R-0805 81.305,24.525 r270 top value=4.7K (schematic designator R32)
R33_1 "RES 4.7K-5%-1/8W-SMD" R-0805 68.471,85.475 r90 top value=4.7K (schematic designator R33)
R33_2 "RES 4.7K-5%-1/8W-SMD" R-0805 86.471,85.475 r90 top value=4.7K (schematic designator R33)
R33_3 "RES 4.7K-5%-1/8W-SMD" R-0805 104.471,85.475 r90 top value=4.7K (schematic designator R33)
R33_4 "RES 4.7K-5%-1/8W-SMD" R-0805 122.471,85.475 r90 top value=4.7K (schematic designator R33)
R33_5 "RES 4.7K-5%-1/8W-SMD" R-0805 132.77,24.525 r270 top value=4.7K (schematic designator R33)
R33_6 "RES 4.7K-5%-1/8W-SMD" R-0805 114.775,24.525 r270 top value=4.7K (schematic designator R33)
R33_7 "RES 4.7K-5%-1/8W-SMD" R-0805 96.775,24.525 r270 top value=4.7K (schematic designator R33)
R33_8 "RES 4.7K-5%-1/8W-SMD" R-0805 78.775,24.525 r270 top value=4.7K (schematic designator R33)
R34_1 "RES 4.7K-5%-1/8W-SMD" R-0805 70.997,85.475 r90 top value=4.7K (schematic designator R34)
R34_2 "RES 4.7K-5%-1/8W-SMD" R-0805 88.997,85.475 r90 top value=4.7K (schematic designator R34)
R34_3 "RES 4.7K-5%-1/8W-SMD" R-0805 106.997,85.475 r90 top value=4.7K (schematic designator R34)
R34_4 "RES 4.7K-5%-1/8W-SMD" R-0805 124.997,85.475 r90 top value=4.7K (schematic designator R34)
R34_5 "RES 4.7K-5%-1/8W-SMD" R-0805 130.245,24.525 r270 top value=4.7K (schematic designator R34)
R34_6 "RES 4.7K-5%-1/8W-SMD" R-0805 112.25,24.525 r270 top value=4.7K (schematic designator R34)
R34_7 "RES 4.7K-5%-1/8W-SMD" R-0805 94.25,24.525 r270 top value=4.7K (schematic designator R34)
R34_8 "RES 4.7K-5%-1/8W-SMD" R-0805 76.25,24.525 r270 top value=4.7K (schematic designator R34)
R35_1 "RES 4.7K-5%-1/8W-SMD" R-0805 73.523,85.475 r90 top value=4.7K (schematic designator R35)
R35_2 "RES 4.7K-5%-1/8W-SMD" R-0805 91.523,85.475 r90 top value=4.7K (schematic designator R35)
R35_3 "RES 4.7K-5%-1/8W-SMD" R-0805 109.523,85.475 r90 top value=4.7K (schematic designator R35)
R35_4 "RES 4.7K-5%-1/8W-SMD" R-0805 127.523,85.475 r90 top value=4.7K (schematic designator R35)
R35_5 "RES 4.7K-5%-1/8W-SMD" R-0805 127.72,24.525 r270 top value=4.7K (schematic designator R35)
R35_6 "RES 4.7K-5%-1/8W-SMD" R-0805 109.725,24.525 r270 top value=4.7K (schematic designator R35)
R35_7 "RES 4.7K-5%-1/8W-SMD" R-0805 91.725,24.525 r270 top value=4.7K (schematic designator R35)
R35_8 "RES 4.7K-5%-1/8W-SMD" R-0805 73.725,24.525 r270 top value=4.7K (schematic designator R35)
R36_1 "RES 4.7K-5%-1/8W-SMD" R-0805 76.048,85.475 r90 top value=4.7K (schematic designator R36)
R36_2 "RES 4.7K-5%-1/8W-SMD" R-0805 94.048,85.475 r90 top value=4.7K (schematic designator R36)
R36_3 "RES 4.7K-5%-1/8W-SMD" R-0805 112.048,85.475 r90 top value=4.7K (schematic designator R36)
R36_4 "RES 4.7K-5%-1/8W-SMD" R-0805 130.048,85.475 r90 top value=4.7K (schematic designator R36)
R36_5 "RES 4.7K-5%-1/8W-SMD" R-0805 125.195,24.525 r270 top value=4.7K (schematic designator R36)
R36_6 "RES 4.7K-5%-1/8W-SMD" R-0805 107.2,24.525 r270 top value=4.7K (schematic designator R36)
R36_7 "RES 4.7K-5%-1/8W-SMD" R-0805 89.2,24.525 r270 top value=4.7K (schematic designator R36)
R36_8 "RES 4.7K-5%-1/8W-SMD" R-0805 71.2,24.525 r270 top value=4.7K (schematic designator R36)
R37 "RES 2.2K-5%-1/8W-SMD" R-0805 112.2,61.425 r270 top value=2.2K
R38_1 "RES 4.7K-5%-1/8W-SMD" R-0805 78.574,85.475 r90 top value=4.7K (schematic designator R38)
R38_2 "RES 4.7K-5%-1/8W-SMD" R-0805 96.574,85.475 r90 top value=4.7K (schematic designator R38)
R38_3 "RES 4.7K-5%-1/8W-SMD" R-0805 114.574,85.475 r90 top value=4.7K (schematic designator R38)
R38_4 "RES 4.7K-5%-1/8W-SMD" R-0805 132.574,85.475 r90 top value=4.7K (schematic designator R38)
R38_5 "RES 4.7K-5%-1/8W-SMD" R-0805 122.67,24.525 r270 top value=4.7K (schematic designator R38)
R38_6 "RES 4.7K-5%-1/8W-SMD" R-0805 104.675,24.525 r270 top value=4.7K (schematic designator R38)
R38_7 "RES 4.7K-5%-1/8W-SMD" R-0805 86.675,24.525 r270 top value=4.7K (schematic designator R38)
R38_8 "RES 4.7K-5%-1/8W-SMD" R-0805 68.675,24.525 r270 top value=4.7K (schematic designator R38)
R39_1 "RES 4.7K-5%-1/8W-SMD" R-0805 81.1,85.475 r90 top value=4.7K (schematic designator R39)
R39_2 "RES 4.7K-5%-1/8W-SMD" R-0805 99.1,85.475 r90 top value=4.7K (schematic designator R39)
R39_3 "RES 4.7K-5%-1/8W-SMD" R-0805 117.1,85.475 r90 top value=4.7K (schematic designator R39)
R39_4 "RES 4.7K-5%-1/8W-SMD" R-0805 135.1,85.475 r90 top value=4.7K (schematic designator R39)
R39_5 "RES 4.7K-5%-1/8W-SMD" R-0805 120.145,24.525 r270 top value=4.7K (schematic designator R39)
R39_6 "RES 4.7K-5%-1/8W-SMD" R-0805 102.15,24.525 r270 top value=4.7K (schematic designator R39)
R39_7 "RES 4.7K-5%-1/8W-SMD" R-0805 84.15,24.525 r270 top value=4.7K (schematic designator R39)
R39_8 "RES 4.7K-5%-1/8W-SMD" R-0805 66.15,24.525 r270 top value=4.7K (schematic designator R39)
S1_1 "UP" SW-SMD-2pin-3x6 18.4,85.5 r0 top (schematic designator S1)
S1_2 "UP" SW-SMD-2pin-3x6 18.4,78.7 r0 top (schematic designator S1)
S1_3 "UP" SW-SMD-2pin-3x6 18.4,71.9 r0 top (schematic designator S1)
S2 "RESET" SW-SMD-2pin-3x6 39.9,84.7 r180 top
SB3 "SOLDER BRIDGE-2" SB-ARC 28.1,44 r90 bottom net-tie
SB4 "SOLDER BRIDGE-2" SB-ARC 25.6,44 r90 bottom net-tie
SC1 "Screw 3mm" Screw_M3 5,5 r0 top locked
SC2 "Screw 3mm" Screw_M3 140,105 r0 top locked
SC3 "Screw 3mm" Screw_M3 5,105 r0 top locked
SC4 "Screw 3mm" Screw_M3 140,5 r0 top
TP1 "" "TEST POINT-DIP" 16.4,98.8 r0 top net-tie
TP2 "" "TEST POINT-DIP" 22,66 r0 top net-tie
TP3 "" "TEST POINT-DIP" 16.4,96.3 r0 top net-tie
TP4 "" "TEST POINT-DIP" 16.4,93.8 r90 top net-tie
TP5 "" "TEST POINT-DIP" 25.6,83.4 r0 top net-tie
TP6 "" "TEST POINT-DIP" 13.9,91.3 r90 top net-tie
TP7 "" "TEST POINT-DIP" 13.9,88.8 r90 top net-tie
TP8 "" "TEST POINT-DIP" 25.6,85.9 r0 top net-tie
TP9 "" "TEST POINT-DIP" 15.5,64 r0 top net-tie
TP10 "" "TEST POINT-DIP" 13.9,93.8 r90 top net-tie
TP11 "" "TEST POINT-DIP" 16.4,91.3 r90 top net-tie
TP12 "" "TEST POINT-DIP" 16.4,88.8 r90 top net-tie
TP13 "" "TEST POINT-DIP" 23.4,48.6 r0 top net-tie
TP14 "" "TEST POINT-DIP" 23.4,46.1 r0 top net-tie
TR1 "Terminal KF?/Phoenix-2Pin-?mm-Straight/Right" KF129-2pin 137.5,62.46 r90 top
U1_1 "ULN2003" SOIC16 70.345,78.1 r90 top (schematic designator U1)
U1_2 "ULN2003" SOIC16 88.345,78.1 r90 top (schematic designator U1)
U1_3 "ULN2003" SOIC16 106.345,78.1 r90 top (schematic designator U1)
U1_4 "ULN2003" SOIC16 124.345,78.1 r90 top (schematic designator U1)
U1_5 "ULN2003" SOIC16 130.85,31.6 r270 top (schematic designator U1)
U1_6 "ULN2003" SOIC16 112.855,31.6 r270 top (schematic designator U1)
U1_7 "ULN2003" SOIC16 94.855,31.6 r270 top (schematic designator U1)
U1_8 "ULN2003" SOIC16 76.855,31.6 r270 top (schematic designator U1)
U2 "AT24C04" SOIC8 57.9,25.405 r180 top
U3 "ISD1730" DIP28-wide 10.38,40.49 r180 top locked
U4 "STM32F407ZGT6" STM-LQFP144_M 38.967,55.958 r225 top locked
U5 "AMS1117-3.3V" SOT223 106.096,56 r90 top
U6 "Reg 7805-5V-THD" TO220-HEARSINK-1 121,48.05 r180 top
Y2 "" CRYSTAL-SMD 52.25,84.7 r180 top value=8MHz
ZD1_1 "Zener -3.3V-SMD" SOD80 18.968,91.4 r90 top (schematic designator ZD1)
ZD1_2 "Zener -3.3V-SMD" SOD80 27.468,91.4 r90 top (schematic designator ZD1)
ZD1_3 "Zener -3.3V-SMD" SOD80 35.968,91.4 r90 top (schematic designator ZD1)
ZD1_4 "Zener -3.3V-SMD" SOD80 44.468,91.4 r90 top (schematic designator ZD1)
ZD1_5 "Zener -3.3V-SMD" SOD80 52.968,91.4 r90 top (schematic designator ZD1)
ZD1_6 "Zener -3.3V-SMD" SOD80 61.468,91.4 r90 top (schematic designator ZD1)
ZD1_7 "Zener -3.3V-SMD" SOD80 69.968,91.4 r90 top (schematic designator ZD1)
ZD1_8 "Zener -3.3V-SMD" SOD80 78.468,91.4 r90 top (schematic designator ZD1)
ZD1_9 "Zener -3.3V-SMD" SOD80 86.968,91.4 r90 top (schematic designator ZD1)
ZD1_10 "Zener -3.3V-SMD" SOD80 95.468,91.4 r90 top (schematic designator ZD1)
ZD1_11 "Zener -3.3V-SMD" SOD80 103.968,91.4 r90 top (schematic designator ZD1)
ZD1_12 "Zener -3.3V-SMD" SOD80 112.468,91.4 r90 top (schematic designator ZD1)
ZD1_13 "Zener -3.3V-SMD" SOD80 120.968,91.4 r90 top (schematic designator ZD1)
ZD1_14 "Zener -3.3V-SMD" SOD80 129.468,91.4 r90 top (schematic designator ZD1)
ZD1_15 "Zener -3.3V-SMD" SOD80 129.468,18.8 r270 top (schematic designator ZD1)
ZD1_16 "Zener -3.3V-SMD" SOD80 120.968,18.8 r270 top (schematic designator ZD1)
ZD1_17 "Zener -3.3V-SMD" SOD80 112.468,18.8 r270 top (schematic designator ZD1)
ZD1_18 "Zener -3.3V-SMD" SOD80 103.968,18.8 r270 top (schematic designator ZD1)
ZD1_19 "Zener -3.3V-SMD" SOD80 95.468,18.8 r270 top (schematic designator ZD1)
ZD1_20 "Zener -3.3V-SMD" SOD80 86.968,18.8 r270 top (schematic designator ZD1)